# EAGLE board TXS0108 Breakout-Panel (EAGLE 9.6.2), part 1 of 6
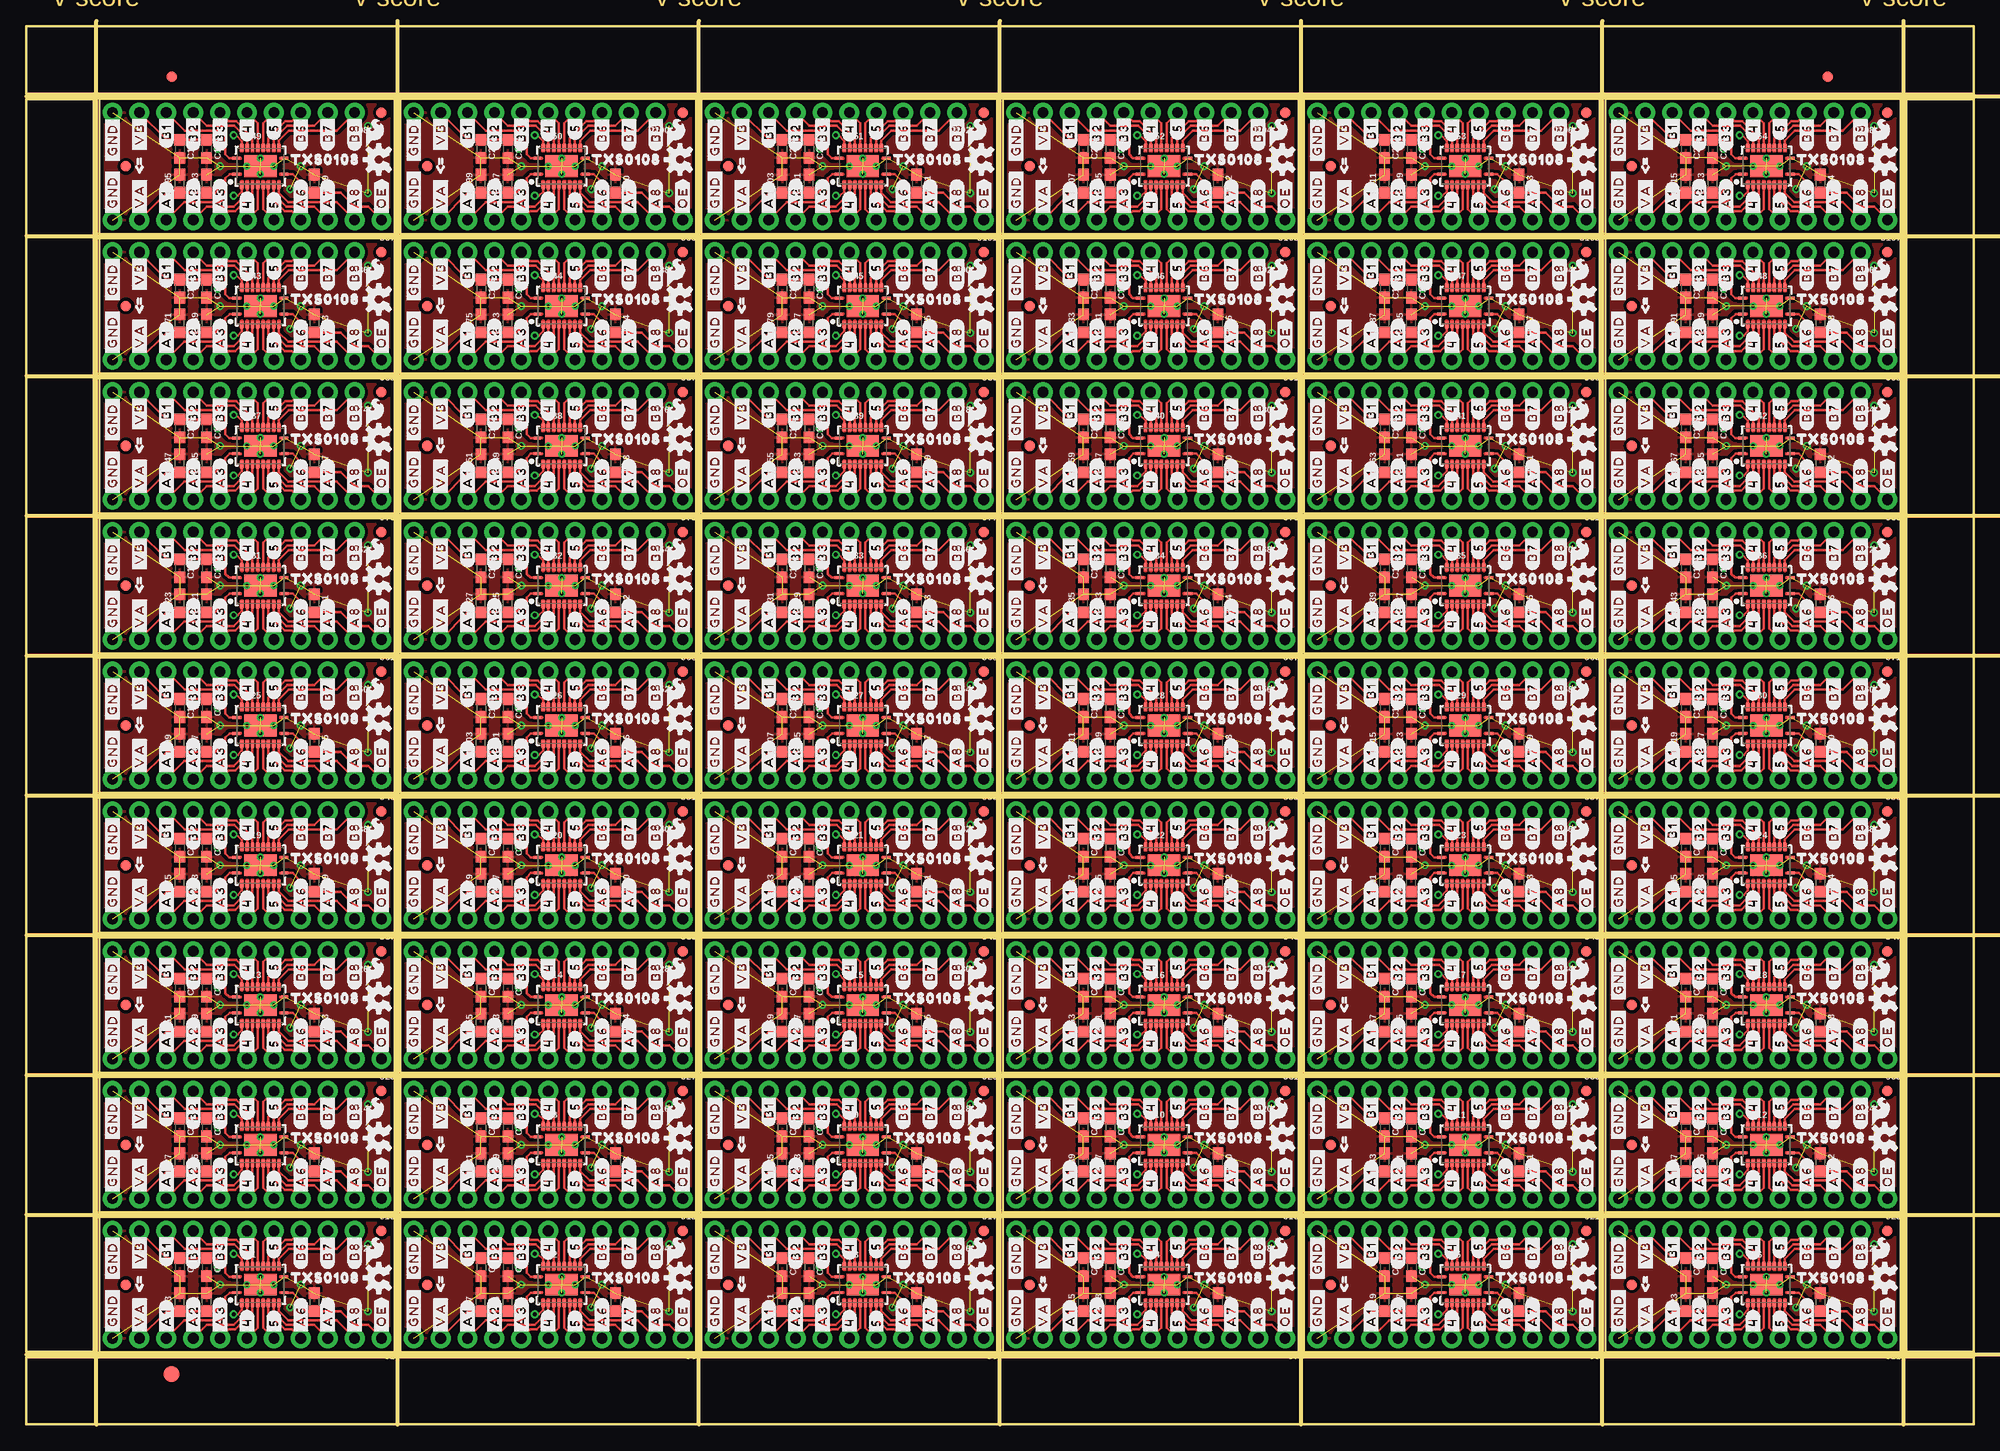
[diagram p0: board, top side]
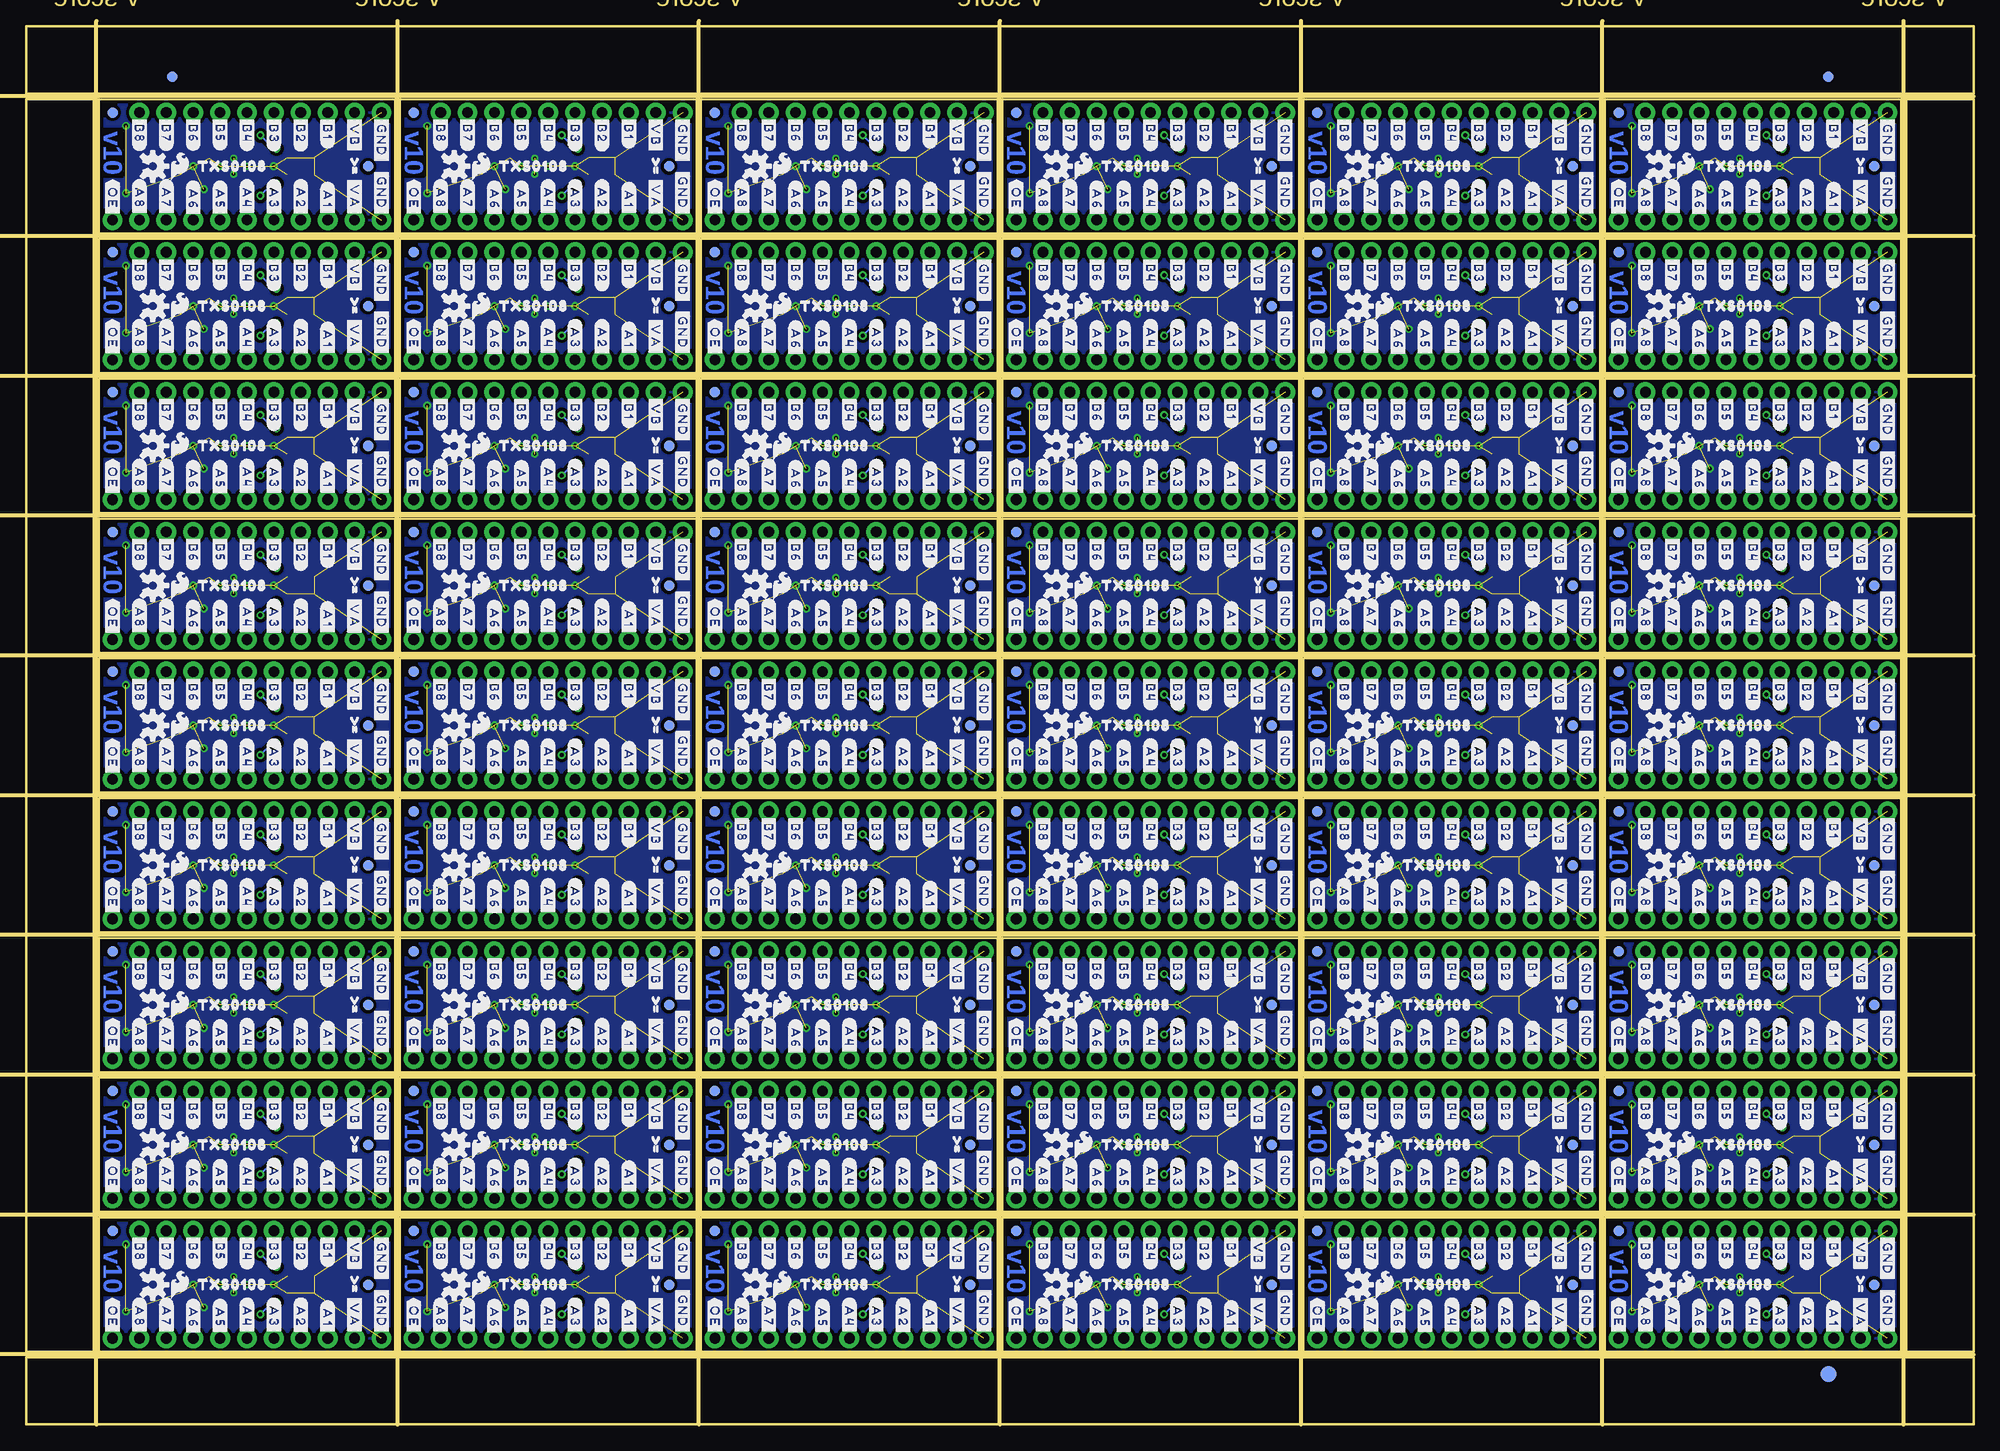
[diagram p1: board, bottom side, seen from below]

Size 183.9 x 132.08 mm. Coordinates in mm from the lower left corner, seen from the top.
Outline: 232 segments
Copper layers (1*16): Top 0.035mm / dielectric 1.5mm / Bottom 0.035mm
Design rules "TXS0108 Breakout": minimum track width 7mil, minimum drill 0.3mm, track to track 7mil, track to pad 7mil, pad to pad 7mil, via to via 7mil, smd to smd 7mil, copper to edge 7mil, drill to drill 7mil, minimum pad ring 7mil, minimum via ring 7mil, stop-mask expansion 3mil, vias tented up to drill 25mil, thermal gap 10mil
tRestrict: area 23.7,13.8 to 23.9,14.1; area 24.2,13.8 to 24.3,13.8; area 20.3,13 to 20.4,13.5; area 23.7,13 to 23.9,13.5; area 52.2,13.8 to 52.3,14.1; area 52.6,13.8 to 52.7,13.8; area 48.8,13 to 48.9,13.5; area 52.2,13 to 52.3,13.5; area 80.6,13.8 to 80.8,14.1; area 81.1,13.8 to 81.2,13.8; area 77.2,13 to 77.3,13.5; area 80.6,13 to 80.8,13.5; 204 more areas
Milling: 17 lines

## Footprints (pad centres in the part's own frame; a part is rotated, then mirrored left to right if it is on the bottom)
0603 = smd 1.1 x 1: 1 -0.85,0; 2 0.85,0
FIDUCIAL-1X2 = smd 1 x 1: 1 0,0
FIDUCIAL-1.5X3 = smd 1.5 x 1.5: 1 0,0
1X11_NO_SILK = drill 1.016 pad 1.88: 1 0,0; 2 2.54,0; 3 5.08,0; 4 7.62,0; 5 10.16,0; 6 12.7,0; 7 15.24,0; 8 17.78,0; 9 20.32,0; 10 22.86,0; 11 25.4,0
1X10_NO_SILK = drill 1.016 pad 1.88: 1 0,0; 2 2.54,0; 3 5.08,0; 4 7.62,0; 5 10.16,0; 6 12.7,0; 7 15.24,0; 8 17.78,0; 9 20.32,0; 10 22.86,0
VFQFN-20 = smd 0.7 x 0.28: 1 -2.3,-0.75; 10 2.3,-0.75; 11 2.3,0.75; 20 -2.3,0.75 | smd 0.28 x 0.7: 2 -1.75,-1.8; 3 -1.25,-1.8; 4 -0.75,-1.8; 5 -0.25,-1.8; 6 0.25,-1.8; 7 0.75,-1.8; 8 1.25,-1.8; 9 1.75,-1.8; 12 1.75,1.8; 13 1.25,1.8; 14 0.75,1.8; 15 0.25,1.8; 16 -0.25,1.8; 17 -0.75,1.8; 18 -1.25,1.8; 19 -1.75,1.8 | smd 3.05 x 2.05: EPAD 0,0

## Placement (x,y rotation side)
C1  0.1uF  [0603]  17.02,11.56 90 top
C2  0.1uF  [0603]  17.02,14.86 270 top
C3  10uF  [0603]  14.48,11.56 90 top
C4  10uF  [0603]  14.48,14.86 270 top
C5  0.1uF  [0603]  45.47,11.56 90 top
C6  0.1uF  [0603]  45.47,14.86 270 top
C7  10uF  [0603]  42.93,11.56 90 top
C8  10uF  [0603]  42.93,14.86 270 top
C9  0.1uF  [0603]  73.91,11.56 90 top
C10  0.1uF  [0603]  73.91,14.86 270 top
C11  10uF  [0603]  71.37,11.56 90 top
C12  10uF  [0603]  71.37,14.86 270 top
C13  0.1uF  [0603]  102.36,11.56 90 top
C14  0.1uF  [0603]  102.36,14.86 270 top
C15  10uF  [0603]  99.82,11.56 90 top
C16  10uF  [0603]  99.82,14.86 270 top
C17  0.1uF  [0603]  130.81,11.56 90 top
C18  0.1uF  [0603]  130.81,14.86 270 top
C19  10uF  [0603]  128.27,11.56 90 top
C20  10uF  [0603]  128.27,14.86 270 top
C21  0.1uF  [0603]  159.26,11.56 90 top
C22  0.1uF  [0603]  159.26,14.86 270 top
C23  10uF  [0603]  156.72,11.56 90 top
C24  10uF  [0603]  156.72,14.86 270 top
C25  0.1uF  [0603]  17.02,24.77 90 top
C26  0.1uF  [0603]  17.02,28.07 270 top
C27  10uF  [0603]  14.48,24.77 90 top
C28  10uF  [0603]  14.48,28.07 270 top
C29  0.1uF  [0603]  45.47,24.77 90 top
C30  0.1uF  [0603]  45.47,28.07 270 top
C31  10uF  [0603]  42.93,24.77 90 top
C32  10uF  [0603]  42.93,28.07 270 top
C33  0.1uF  [0603]  73.91,24.77 90 top
C34  0.1uF  [0603]  73.91,28.07 270 top
C35  10uF  [0603]  71.37,24.77 90 top
C36  10uF  [0603]  71.37,28.07 270 top
C37  0.1uF  [0603]  102.36,24.77 90 top
C38  0.1uF  [0603]  102.36,28.07 270 top
C39  10uF  [0603]  99.82,24.77 90 top
C40  10uF  [0603]  99.82,28.07 270 top
C41  0.1uF  [0603]  130.81,24.77 90 top
C42  0.1uF  [0603]  130.81,28.07 270 top
C43  10uF  [0603]  128.27,24.77 90 top
C44  10uF  [0603]  128.27,28.07 270 top
C45  0.1uF  [0603]  159.26,24.77 90 top
C46  0.1uF  [0603]  159.26,28.07 270 top
C47  10uF  [0603]  156.72,24.77 90 top
C48  10uF  [0603]  156.72,28.07 270 top
C49  0.1uF  [0603]  17.02,37.97 90 top
C50  0.1uF  [0603]  17.02,41.27 270 top
C51  10uF  [0603]  14.48,37.97 90 top
C52  10uF  [0603]  14.48,41.27 270 top
C53  0.1uF  [0603]  45.47,37.97 90 top
C54  0.1uF  [0603]  45.47,41.27 270 top
C55  10uF  [0603]  42.93,37.97 90 top
C56  10uF  [0603]  42.93,41.27 270 top
C57  0.1uF  [0603]  73.91,37.97 90 top
C58  0.1uF  [0603]  73.91,41.27 270 top
C59  10uF  [0603]  71.37,37.97 90 top
C60  10uF  [0603]  71.37,41.27 270 top
C61  0.1uF  [0603]  102.36,37.97 90 top
C62  0.1uF  [0603]  102.36,41.27 270 top
C63  10uF  [0603]  99.82,37.97 90 top
C64  10uF  [0603]  99.82,41.27 270 top
C65  0.1uF  [0603]  130.81,37.97 90 top
C66  0.1uF  [0603]  130.81,41.27 270 top
C67  10uF  [0603]  128.27,37.97 90 top
C68  10uF  [0603]  128.27,41.27 270 top
C69  0.1uF  [0603]  159.26,37.97 90 top
C70  0.1uF  [0603]  159.26,41.27 270 top
C71  10uF  [0603]  156.72,37.97 90 top
C72  10uF  [0603]  156.72,41.27 270 top
C73  0.1uF  [0603]  17.02,51.18 90 top
C74  0.1uF  [0603]  17.02,54.48 270 top
C75  10uF  [0603]  14.48,51.18 90 top
C76  10uF  [0603]  14.48,54.48 270 top
C77  0.1uF  [0603]  45.47,51.18 90 top
C78  0.1uF  [0603]  45.47,54.48 270 top
C79  10uF  [0603]  42.93,51.18 90 top
C80  10uF  [0603]  42.93,54.48 270 top
C81  0.1uF  [0603]  73.91,51.18 90 top
C82  0.1uF  [0603]  73.91,54.48 270 top
C83  10uF  [0603]  71.37,51.18 90 top
C84  10uF  [0603]  71.37,54.48 270 top
C85  0.1uF  [0603]  102.36,51.18 90 top
C86  0.1uF  [0603]  102.36,54.48 270 top
C87  10uF  [0603]  99.82,51.18 90 top
C88  10uF  [0603]  99.82,54.48 270 top
C89  0.1uF  [0603]  130.81,51.18 90 top
C90  0.1uF  [0603]  130.81,54.48 270 top
C91  10uF  [0603]  128.27,51.18 90 top
C92  10uF  [0603]  128.27,54.48 270 top
C93  0.1uF  [0603]  159.26,51.18 90 top
C94  0.1uF  [0603]  159.26,54.48 270 top
C95  10uF  [0603]  156.72,51.18 90 top
C96  10uF  [0603]  156.72,54.48 270 top
C97  0.1uF  [0603]  17.02,64.39 90 top
C98  0.1uF  [0603]  17.02,67.69 270 top
C99  10uF  [0603]  14.48,64.39 90 top
C100  10uF  [0603]  14.48,67.69 270 top
C101  0.1uF  [0603]  45.47,64.39 90 top
C102  0.1uF  [0603]  45.47,67.69 270 top
C103  10uF  [0603]  42.93,64.39 90 top
C104  10uF  [0603]  42.93,67.69 270 top
C105  0.1uF  [0603]  73.91,64.39 90 top
C106  0.1uF  [0603]  73.91,67.69 270 top
C107  10uF  [0603]  71.37,64.39 90 top
C108  10uF  [0603]  71.37,67.69 270 top
C109  0.1uF  [0603]  102.36,64.39 90 top
C110  0.1uF  [0603]  102.36,67.69 270 top
C111  10uF  [0603]  99.82,64.39 90 top
C112  10uF  [0603]  99.82,67.69 270 top
C113  0.1uF  [0603]  130.81,64.39 90 top
C114  0.1uF  [0603]  130.81,67.69 270 top
C115  10uF  [0603]  128.27,64.39 90 top
C116  10uF  [0603]  128.27,67.69 270 top
C117  0.1uF  [0603]  159.26,64.39 90 top
C118  0.1uF  [0603]  159.26,67.69 270 top
C119  10uF  [0603]  156.72,64.39 90 top
C120  10uF  [0603]  156.72,67.69 270 top
C121  0.1uF  [0603]  17.02,77.6 90 top
C122  0.1uF  [0603]  17.02,80.9 270 top
C123  10uF  [0603]  14.48,77.6 90 top
C124  10uF  [0603]  14.48,80.9 270 top
C125  0.1uF  [0603]  45.47,77.6 90 top
C126  0.1uF  [0603]  45.47,80.9 270 top
C127  10uF  [0603]  42.93,77.6 90 top
C128  10uF  [0603]  42.93,80.9 270 top
C129  0.1uF  [0603]  73.91,77.6 90 top
C130  0.1uF  [0603]  73.91,80.9 270 top
C131  10uF  [0603]  71.37,77.6 90 top
C132  10uF  [0603]  71.37,80.9 270 top
C133  0.1uF  [0603]  102.36,77.6 90 top
C134  0.1uF  [0603]  102.36,80.9 270 top
C135  10uF  [0603]  99.82,77.6 90 top
C136  10uF  [0603]  99.82,80.9 270 top
C137  0.1uF  [0603]  130.81,77.6 90 top
C138  0.1uF  [0603]  130.81,80.9 270 top
C139  10uF  [0603]  128.27,77.6 90 top
C140  10uF  [0603]  128.27,80.9 270 top
C141  0.1uF  [0603]  159.26,77.6 90 top
C142  0.1uF  [0603]  159.26,80.9 270 top
C143  10uF  [0603]  156.72,77.6 90 top
C144  10uF  [0603]  156.72,80.9 270 top
C145  0.1uF  [0603]  17.02,90.81 90 top
C146  0.1uF  [0603]  17.02,94.11 270 top
C147  10uF  [0603]  14.48,90.81 90 top
C148  10uF  [0603]  14.48,94.11 270 top
C149  0.1uF  [0603]  45.47,90.81 90 top
C150  0.1uF  [0603]  45.47,94.11 270 top
C151  10uF  [0603]  42.93,90.81 90 top
C152  10uF  [0603]  42.93,94.11 270 top
C153  0.1uF  [0603]  73.91,90.81 90 top
C154  0.1uF  [0603]  73.91,94.11 270 top
C155  10uF  [0603]  71.37,90.81 90 top
C156  10uF  [0603]  71.37,94.11 270 top
C157  0.1uF  [0603]  102.36,90.81 90 top
C158  0.1uF  [0603]  102.36,94.11 270 top
C159  10uF  [0603]  99.82,90.81 90 top
C160  10uF  [0603]  99.82,94.11 270 top
C161  0.1uF  [0603]  130.81,90.81 90 top
C162  0.1uF  [0603]  130.81,94.11 270 top
C163  10uF  [0603]  128.27,90.81 90 top
C164  10uF  [0603]  128.27,94.11 270 top
C165  0.1uF  [0603]  159.26,90.81 90 top
C166  0.1uF  [0603]  159.26,94.11 270 top
C167  10uF  [0603]  156.72,90.81 90 top
C168  10uF  [0603]  156.72,94.11 270 top
C169  0.1uF  [0603]  17.02,104.01 90 top
C170  0.1uF  [0603]  17.02,107.31 270 top
C171  10uF  [0603]  14.48,104.01 90 top
C172  10uF  [0603]  14.48,107.31 270 top
C173  0.1uF  [0603]  45.47,104.01 90 top
C174  0.1uF  [0603]  45.47,107.31 270 top
C175  10uF  [0603]  42.93,104.01 90 top
C176  10uF  [0603]  42.93,107.31 270 top
C177  0.1uF  [0603]  73.91,104.01 90 top
C178  0.1uF  [0603]  73.91,107.31 270 top
C179  10uF  [0603]  71.37,104.01 90 top
C180  10uF  [0603]  71.37,107.31 270 top
C181  0.1uF  [0603]  102.36,104.01 90 top
C182  0.1uF  [0603]  102.36,107.31 270 top
C183  10uF  [0603]  99.82,104.01 90 top
C184  10uF  [0603]  99.82,107.31 270 top
C185  0.1uF  [0603]  130.81,104.01 90 top
C186  0.1uF  [0603]  130.81,107.31 270 top
C187  10uF  [0603]  128.27,104.01 90 top
C188  10uF  [0603]  128.27,107.31 270 top
C189  0.1uF  [0603]  159.26,104.01 90 top
C190  0.1uF  [0603]  159.26,107.31 270 top
C191  10uF  [0603]  156.72,104.01 90 top
C192  10uF  [0603]  156.72,107.31 270 top
C193  0.1uF  [0603]  17.02,117.22 90 top
C194  0.1uF  [0603]  17.02,120.52 270 top
C195  10uF  [0603]  14.48,117.22 90 top
C196  10uF  [0603]  14.48,120.52 270 top
C197  0.1uF  [0603]  45.47,117.22 90 top
C198  0.1uF  [0603]  45.47,120.52 270 top
C199  10uF  [0603]  42.93,117.22 90 top
C200  10uF  [0603]  42.93,120.52 270 top
C201  0.1uF  [0603]  73.91,117.22 90 top
C202  0.1uF  [0603]  73.91,120.52 270 top
C203  10uF  [0603]  71.37,117.22 90 top
C204  10uF  [0603]  71.37,120.52 270 top
C205  0.1uF  [0603]  102.36,117.22 90 top
C206  0.1uF  [0603]  102.36,120.52 270 top
C207  10uF  [0603]  99.82,117.22 90 top
C208  10uF  [0603]  99.82,120.52 270 top
C209  0.1uF  [0603]  130.81,117.22 90 top
C210  0.1uF  [0603]  130.81,120.52 270 top
C211  10uF  [0603]  128.27,117.22 90 top
C212  10uF  [0603]  128.27,120.52 270 top
C213  0.1uF  [0603]  159.26,117.22 90 top
C214  0.1uF  [0603]  159.26,120.52 270 top
C215  10uF  [0603]  156.72,117.22 90 top
C216  10uF  [0603]  156.72,120.52 270 top
E$1  [FIDUCIAL-1X2]  13.72,127.32 0 top
E$2  [FIDUCIAL-1X2]  13.72,127.32 0 bottom
E$3  [FIDUCIAL-1X2]  170.12,127.32 0 top
E$4  [FIDUCIAL-1X2]  170.12,127.32 0 bottom
E$5  [FIDUCIAL-1.5X3]  13.72,4.76 0 top
E$6  [FIDUCIAL-1.5X3]  13.72,4.76 0 bottom
FD1  FIDUCIAL1X2  [FIDUCIAL-1X2]  33.53,18.29 0 top
FD2  FIDUCIAL1X2  [FIDUCIAL-1X2]  33.53,18.29 0 bottom
FD3  FIDUCIAL1X2  [FIDUCIAL-1X2]  9.4,13.21 0 top
FD4  FIDUCIAL1X2  [FIDUCIAL-1X2]  9.4,13.21 0 bottom
FD5  FIDUCIAL1X2  [FIDUCIAL-1X2]  61.98,18.29 0 top
FD6  FIDUCIAL1X2  [FIDUCIAL-1X2]  61.98,18.29 0 bottom
FD7  FIDUCIAL1X2  [FIDUCIAL-1X2]  37.85,13.21 0 top
FD8  FIDUCIAL1X2  [FIDUCIAL-1X2]  37.85,13.21 0 bottom
FD9  FIDUCIAL1X2  [FIDUCIAL-1X2]  90.42,18.29 0 top
FD10  FIDUCIAL1X2  [FIDUCIAL-1X2]  90.42,18.29 0 bottom
FD11  FIDUCIAL1X2  [FIDUCIAL-1X2]  66.29,13.21 0 top
FD12  FIDUCIAL1X2  [FIDUCIAL-1X2]  66.29,13.21 0 bottom
FD13  FIDUCIAL1X2  [FIDUCIAL-1X2]  118.87,18.29 0 top
FD14  FIDUCIAL1X2  [FIDUCIAL-1X2]  118.87,18.29 0 bottom
FD15  FIDUCIAL1X2  [FIDUCIAL-1X2]  94.74,13.21 0 top
FD16  FIDUCIAL1X2  [FIDUCIAL-1X2]  94.74,13.21 0 bottom
FD17  FIDUCIAL1X2  [FIDUCIAL-1X2]  147.32,18.29 0 top
FD18  FIDUCIAL1X2  [FIDUCIAL-1X2]  147.32,18.29 0 bottom
FD19  FIDUCIAL1X2  [FIDUCIAL-1X2]  123.19,13.21 0 top
FD20  FIDUCIAL1X2  [FIDUCIAL-1X2]  123.19,13.21 0 bottom
FD21  FIDUCIAL1X2  [FIDUCIAL-1X2]  175.77,18.29 0 top
FD22  FIDUCIAL1X2  [FIDUCIAL-1X2]  175.77,18.29 0 bottom
FD23  FIDUCIAL1X2  [FIDUCIAL-1X2]  151.64,13.21 0 top
FD24  FIDUCIAL1X2  [FIDUCIAL-1X2]  151.64,13.21 0 bottom
FD25  FIDUCIAL1X2  [FIDUCIAL-1X2]  33.53,31.5 0 top
FD26  FIDUCIAL1X2  [FIDUCIAL-1X2]  33.53,31.5 0 bottom
FD27  FIDUCIAL1X2  [FIDUCIAL-1X2]  9.4,26.42 0 top
FD28  FIDUCIAL1X2  [FIDUCIAL-1X2]  9.4,26.42 0 bottom
FD29  FIDUCIAL1X2  [FIDUCIAL-1X2]  61.98,31.5 0 top
FD30  FIDUCIAL1X2  [FIDUCIAL-1X2]  61.98,31.5 0 bottom
FD31  FIDUCIAL1X2  [FIDUCIAL-1X2]  37.85,26.42 0 top
FD32  FIDUCIAL1X2  [FIDUCIAL-1X2]  37.85,26.42 0 bottom
FD33  FIDUCIAL1X2  [FIDUCIAL-1X2]  90.42,31.5 0 top
FD34  FIDUCIAL1X2  [FIDUCIAL-1X2]  90.42,31.5 0 bottom
FD35  FIDUCIAL1X2  [FIDUCIAL-1X2]  66.29,26.42 0 top
FD36  FIDUCIAL1X2  [FIDUCIAL-1X2]  66.29,26.42 0 bottom
FD37  FIDUCIAL1X2  [FIDUCIAL-1X2]  118.87,31.5 0 top
FD38  FIDUCIAL1X2  [FIDUCIAL-1X2]  118.87,31.5 0 bottom
FD39  FIDUCIAL1X2  [FIDUCIAL-1X2]  94.74,26.42 0 top
FD40  FIDUCIAL1X2  [FIDUCIAL-1X2]  94.74,26.42 0 bottom
FD41  FIDUCIAL1X2  [FIDUCIAL-1X2]  147.32,31.5 0 top
FD42  FIDUCIAL1X2  [FIDUCIAL-1X2]  147.32,31.5 0 bottom
FD43  FIDUCIAL1X2  [FIDUCIAL-1X2]  123.19,26.42 0 top
FD44  FIDUCIAL1X2  [FIDUCIAL-1X2]  123.19,26.42 0 bottom
FD45  FIDUCIAL1X2  [FIDUCIAL-1X2]  175.77,31.5 0 top
FD46  FIDUCIAL1X2  [FIDUCIAL-1X2]  175.77,31.5 0 bottom
FD47  FIDUCIAL1X2  [FIDUCIAL-1X2]  151.64,26.42 0 top
FD48  FIDUCIAL1X2  [FIDUCIAL-1X2]  151.64,26.42 0 bottom
FD49  FIDUCIAL1X2  [FIDUCIAL-1X2]  33.53,44.7 0 top
FD50  FIDUCIAL1X2  [FIDUCIAL-1X2]  33.53,44.7 0 bottom
FD51  FIDUCIAL1X2  [FIDUCIAL-1X2]  9.4,39.62 0 top
FD52  FIDUCIAL1X2  [FIDUCIAL-1X2]  9.4,39.62 0 bottom
FD53  FIDUCIAL1X2  [FIDUCIAL-1X2]  61.98,44.7 0 top
FD54  FIDUCIAL1X2  [FIDUCIAL-1X2]  61.98,44.7 0 bottom
FD55  FIDUCIAL1X2  [FIDUCIAL-1X2]  37.85,39.62 0 top
FD56  FIDUCIAL1X2  [FIDUCIAL-1X2]  37.85,39.62 0 bottom
FD57  FIDUCIAL1X2  [FIDUCIAL-1X2]  90.42,44.7 0 top
FD58  FIDUCIAL1X2  [FIDUCIAL-1X2]  90.42,44.7 0 bottom
FD59  FIDUCIAL1X2  [FIDUCIAL-1X2]  66.29,39.62 0 top
FD60  FIDUCIAL1X2  [FIDUCIAL-1X2]  66.29,39.62 0 bottom
FD61  FIDUCIAL1X2  [FIDUCIAL-1X2]  118.87,44.7 0 top
FD62  FIDUCIAL1X2  [FIDUCIAL-1X2]  118.87,44.7 0 bottom
FD63  FIDUCIAL1X2  [FIDUCIAL-1X2]  94.74,39.62 0 top
FD64  FIDUCIAL1X2  [FIDUCIAL-1X2]  94.74,39.62 0 bottom
FD65  FIDUCIAL1X2  [FIDUCIAL-1X2]  147.32,44.7 0 top
FD66  FIDUCIAL1X2  [FIDUCIAL-1X2]  147.32,44.7 0 bottom
FD67  FIDUCIAL1X2  [FIDUCIAL-1X2]  123.19,39.62 0 top
FD68  FIDUCIAL1X2  [FIDUCIAL-1X2]  123.19,39.62 0 bottom
FD69  FIDUCIAL1X2  [FIDUCIAL-1X2]  175.77,44.7 0 top
FD70  FIDUCIAL1X2  [FIDUCIAL-1X2]  175.77,44.7 0 bottom
FD71  FIDUCIAL1X2  [FIDUCIAL-1X2]  151.64,39.62 0 top
FD72  FIDUCIAL1X2  [FIDUCIAL-1X2]  151.64,39.62 0 bottom
FD73  FIDUCIAL1X2  [FIDUCIAL-1X2]  33.53,57.91 0 top
FD74  FIDUCIAL1X2  [FIDUCIAL-1X2]  33.53,57.91 0 bottom
FD75  FIDUCIAL1X2  [FIDUCIAL-1X2]  9.4,52.83 0 top
FD76  FIDUCIAL1X2  [FIDUCIAL-1X2]  9.4,52.83 0 bottom
FD77  FIDUCIAL1X2  [FIDUCIAL-1X2]  61.98,57.91 0 top
FD78  FIDUCIAL1X2  [FIDUCIAL-1X2]  61.98,57.91 0 bottom
FD79  FIDUCIAL1X2  [FIDUCIAL-1X2]  37.85,52.83 0 top
FD80  FIDUCIAL1X2  [FIDUCIAL-1X2]  37.85,52.83 0 bottom
FD81  FIDUCIAL1X2  [FIDUCIAL-1X2]  90.42,57.91 0 top
FD82  FIDUCIAL1X2  [FIDUCIAL-1X2]  90.42,57.91 0 bottom
FD83  FIDUCIAL1X2  [FIDUCIAL-1X2]  66.29,52.83 0 top
FD84  FIDUCIAL1X2  [FIDUCIAL-1X2]  66.29,52.83 0 bottom
FD85  FIDUCIAL1X2  [FIDUCIAL-1X2]  118.87,57.91 0 top
FD86  FIDUCIAL1X2  [FIDUCIAL-1X2]  118.87,57.91 0 bottom
FD87  FIDUCIAL1X2  [FIDUCIAL-1X2]  94.74,52.83 0 top
FD88  FIDUCIAL1X2  [FIDUCIAL-1X2]  94.74,52.83 0 bottom
FD89  FIDUCIAL1X2  [FIDUCIAL-1X2]  147.32,57.91 0 top
FD90  FIDUCIAL1X2  [FIDUCIAL-1X2]  147.32,57.91 0 bottom
FD91  FIDUCIAL1X2  [FIDUCIAL-1X2]  123.19,52.83 0 top
FD92  FIDUCIAL1X2  [FIDUCIAL-1X2]  123.19,52.83 0 bottom
FD93  FIDUCIAL1X2  [FIDUCIAL-1X2]  175.77,57.91 0 top
FD94  FIDUCIAL1X2  [FIDUCIAL-1X2]  175.77,57.91 0 bottom
FD95  FIDUCIAL1X2  [FIDUCIAL-1X2]  151.64,52.83 0 top
FD96  FIDUCIAL1X2  [FIDUCIAL-1X2]  151.64,52.83 0 bottom
FD97  FIDUCIAL1X2  [FIDUCIAL-1X2]  33.53,71.12 0 top
FD98  FIDUCIAL1X2  [FIDUCIAL-1X2]  33.53,71.12 0 bottom
FD99  FIDUCIAL1X2  [FIDUCIAL-1X2]  9.4,66.04 0 top
FD100  FIDUCIAL1X2  [FIDUCIAL-1X2]  9.4,66.04 0 bottom
FD101  FIDUCIAL1X2  [FIDUCIAL-1X2]  61.98,71.12 0 top
FD102  FIDUCIAL1X2  [FIDUCIAL-1X2]  61.98,71.12 0 bottom
FD103  FIDUCIAL1X2  [FIDUCIAL-1X2]  37.85,66.04 0 top
FD104  FIDUCIAL1X2  [FIDUCIAL-1X2]  37.85,66.04 0 bottom
FD105  FIDUCIAL1X2  [FIDUCIAL-1X2]  90.42,71.12 0 top
FD106  FIDUCIAL1X2  [FIDUCIAL-1X2]  90.42,71.12 0 bottom
FD107  FIDUCIAL1X2  [FIDUCIAL-1X2]  66.29,66.04 0 top
FD108  FIDUCIAL1X2  [FIDUCIAL-1X2]  66.29,66.04 0 bottom
FD109  FIDUCIAL1X2  [FIDUCIAL-1X2]  118.87,71.12 0 top
FD110  FIDUCIAL1X2  [FIDUCIAL-1X2]  118.87,71.12 0 bottom
FD111  FIDUCIAL1X2  [FIDUCIAL-1X2]  94.74,66.04 0 top
FD112  FIDUCIAL1X2  [FIDUCIAL-1X2]  94.74,66.04 0 bottom
FD113  FIDUCIAL1X2  [FIDUCIAL-1X2]  147.32,71.12 0 top
FD114  FIDUCIAL1X2  [FIDUCIAL-1X2]  147.32,71.12 0 bottom
FD115  FIDUCIAL1X2  [FIDUCIAL-1X2]  123.19,66.04 0 top
FD116  FIDUCIAL1X2  [FIDUCIAL-1X2]  123.19,66.04 0 bottom
FD117  FIDUCIAL1X2  [FIDUCIAL-1X2]  175.77,71.12 0 top
FD118  FIDUCIAL1X2  [FIDUCIAL-1X2]  175.77,71.12 0 bottom
FD119  FIDUCIAL1X2  [FIDUCIAL-1X2]  151.64,66.04 0 top
FD120  FIDUCIAL1X2  [FIDUCIAL-1X2]  151.64,66.04 0 bottom
FD121  FIDUCIAL1X2  [FIDUCIAL-1X2]  33.53,84.33 0 top
FD122  FIDUCIAL1X2  [FIDUCIAL-1X2]  33.53,84.33 0 bottom
FD123  FIDUCIAL1X2  [FIDUCIAL-1X2]  9.4,79.25 0 top
FD124  FIDUCIAL1X2  [FIDUCIAL-1X2]  9.4,79.25 0 bottom
FD125  FIDUCIAL1X2  [FIDUCIAL-1X2]  61.98,84.33 0 top
FD126  FIDUCIAL1X2  [FIDUCIAL-1X2]  61.98,84.33 0 bottom
FD127  FIDUCIAL1X2  [FIDUCIAL-1X2]  37.85,79.25 0 top
FD128  FIDUCIAL1X2  [FIDUCIAL-1X2]  37.85,79.25 0 bottom
FD129  FIDUCIAL1X2  [FIDUCIAL-1X2]  90.42,84.33 0 top
FD130  FIDUCIAL1X2  [FIDUCIAL-1X2]  90.42,84.33 0 bottom
FD131  FIDUCIAL1X2  [FIDUCIAL-1X2]  66.29,79.25 0 top
FD132  FIDUCIAL1X2  [FIDUCIAL-1X2]  66.29,79.25 0 bottom
FD133  FIDUCIAL1X2  [FIDUCIAL-1X2]  118.87,84.33 0 top
FD134  FIDUCIAL1X2  [FIDUCIAL-1X2]  118.87,84.33 0 bottom
FD135  FIDUCIAL1X2  [FIDUCIAL-1X2]  94.74,79.25 0 top
FD136  FIDUCIAL1X2  [FIDUCIAL-1X2]  94.74,79.25 0 bottom
FD137  FIDUCIAL1X2  [FIDUCIAL-1X2]  147.32,84.33 0 top
FD138  FIDUCIAL1X2  [FIDUCIAL-1X2]  147.32,84.33 0 bottom
FD139  FIDUCIAL1X2  [FIDUCIAL-1X2]  123.19,79.25 0 top
FD140  FIDUCIAL1X2  [FIDUCIAL-1X2]  123.19,79.25 0 bottom
FD141  FIDUCIAL1X2  [FIDUCIAL-1X2]  175.77,84.33 0 top
FD142  FIDUCIAL1X2  [FIDUCIAL-1X2]  175.77,84.33 0 bottom
FD143  FIDUCIAL1X2  [FIDUCIAL-1X2]  151.64,79.25 0 top
FD144  FIDUCIAL1X2  [FIDUCIAL-1X2]  151.64,79.25 0 bottom
FD145  FIDUCIAL1X2  [FIDUCIAL-1X2]  33.53,97.54 0 top
FD146  FIDUCIAL1X2  [FIDUCIAL-1X2]  33.53,97.54 0 bottom
FD147  FIDUCIAL1X2  [FIDUCIAL-1X2]  9.4,92.46 0 top
FD148  FIDUCIAL1X2  [FIDUCIAL-1X2]  9.4,92.46 0 bottom
FD149  FIDUCIAL1X2  [FIDUCIAL-1X2]  61.98,97.54 0 top
FD150  FIDUCIAL1X2  [FIDUCIAL-1X2]  61.98,97.54 0 bottom
FD151  FIDUCIAL1X2  [FIDUCIAL-1X2]  37.85,92.46 0 top
FD152  FIDUCIAL1X2  [FIDUCIAL-1X2]  37.85,92.46 0 bottom
FD153  FIDUCIAL1X2  [FIDUCIAL-1X2]  90.42,97.54 0 top
FD154  FIDUCIAL1X2  [FIDUCIAL-1X2]  90.42,97.54 0 bottom
FD155  FIDUCIAL1X2  [FIDUCIAL-1X2]  66.29,92.46 0 top
FD156  FIDUCIAL1X2  [FIDUCIAL-1X2]  66.29,92.46 0 bottom
FD157  FIDUCIAL1X2  [FIDUCIAL-1X2]  118.87,97.54 0 top
FD158  FIDUCIAL1X2  [FIDUCIAL-1X2]  118.87,97.54 0 bottom
FD159  FIDUCIAL1X2  [FIDUCIAL-1X2]  94.74,92.46 0 top
FD160  FIDUCIAL1X2  [FIDUCIAL-1X2]  94.74,92.46 0 bottom
FD161  FIDUCIAL1X2  [FIDUCIAL-1X2]  147.32,97.54 0 top
FD162  FIDUCIAL1X2  [FIDUCIAL-1X2]  147.32,97.54 0 bottom
FD163  FIDUCIAL1X2  [FIDUCIAL-1X2]  123.19,92.46 0 top
FD164  FIDUCIAL1X2  [FIDUCIAL-1X2]  123.19,92.46 0 bottom
FD165  FIDUCIAL1X2  [FIDUCIAL-1X2]  175.77,97.54 0 top
FD166  FIDUCIAL1X2  [FIDUCIAL-1X2]  175.77,97.54 0 bottom
FD167  FIDUCIAL1X2  [FIDUCIAL-1X2]  151.64,92.46 0 top
FD168  FIDUCIAL1X2  [FIDUCIAL-1X2]  151.64,92.46 0 bottom
FD169  FIDUCIAL1X2  [FIDUCIAL-1X2]  33.53,110.74 0 top
FD170  FIDUCIAL1X2  [FIDUCIAL-1X2]  33.53,110.74 0 bottom
FD171  FIDUCIAL1X2  [FIDUCIAL-1X2]  9.4,105.66 0 top
FD172  FIDUCIAL1X2  [FIDUCIAL-1X2]  9.4,105.66 0 bottom
FD173  FIDUCIAL1X2  [FIDUCIAL-1X2]  61.98,110.74 0 top
FD174  FIDUCIAL1X2  [FIDUCIAL-1X2]  61.98,110.74 0 bottom
FD175  FIDUCIAL1X2  [FIDUCIAL-1X2]  37.85,105.66 0 top
FD176  FIDUCIAL1X2  [FIDUCIAL-1X2]  37.85,105.66 0 bottom
FD177  FIDUCIAL1X2  [FIDUCIAL-1X2]  90.42,110.74 0 top
FD178  FIDUCIAL1X2  [FIDUCIAL-1X2]  90.42,110.74 0 bottom
FD179  FIDUCIAL1X2  [FIDUCIAL-1X2]  66.29,105.66 0 top
FD180  FIDUCIAL1X2  [FIDUCIAL-1X2]  66.29,105.66 0 bottom
FD181  FIDUCIAL1X2  [FIDUCIAL-1X2]  118.87,110.74 0 top
FD182  FIDUCIAL1X2  [FIDUCIAL-1X2]  118.87,110.74 0 bottom
FD183  FIDUCIAL1X2  [FIDUCIAL-1X2]  94.74,105.66 0 top
FD184  FIDUCIAL1X2  [FIDUCIAL-1X2]  94.74,105.66 0 bottom
FD185  FIDUCIAL1X2  [FIDUCIAL-1X2]  147.32,110.74 0 top
FD186  FIDUCIAL1X2  [FIDUCIAL-1X2]  147.32,110.74 0 bottom
FD187  FIDUCIAL1X2  [FIDUCIAL-1X2]  123.19,105.66 0 top
FD188  FIDUCIAL1X2  [FIDUCIAL-1X2]  123.19,105.66 0 bottom
FD189  FIDUCIAL1X2  [FIDUCIAL-1X2]  175.77,110.74 0 top
FD190  FIDUCIAL1X2  [FIDUCIAL-1X2]  175.77,110.74 0 bottom
FD191  FIDUCIAL1X2  [FIDUCIAL-1X2]  151.64,105.66 0 top
FD192  FIDUCIAL1X2  [FIDUCIAL-1X2]  151.64,105.66 0 bottom
FD193  FIDUCIAL1X2  [FIDUCIAL-1X2]  33.53,123.95 0 top
FD194  FIDUCIAL1X2  [FIDUCIAL-1X2]  33.53,123.95 0 bottom
FD195  FIDUCIAL1X2  [FIDUCIAL-1X2]  9.4,118.87 0 top
FD196  FIDUCIAL1X2  [FIDUCIAL-1X2]  9.4,118.87 0 bottom
FD197  FIDUCIAL1X2  [FIDUCIAL-1X2]  61.98,123.95 0 top
FD198  FIDUCIAL1X2  [FIDUCIAL-1X2]  61.98,123.95 0 bottom
FD199  FIDUCIAL1X2  [FIDUCIAL-1X2]  37.85,118.87 0 top
FD200  FIDUCIAL1X2  [FIDUCIAL-1X2]  37.85,118.87 0 bottom
FD201  FIDUCIAL1X2  [FIDUCIAL-1X2]  90.42,123.95 0 top
FD202  FIDUCIAL1X2  [FIDUCIAL-1X2]  90.42,123.95 0 bottom
FD203  FIDUCIAL1X2  [FIDUCIAL-1X2]  66.29,118.87 0 top
FD204  FIDUCIAL1X2  [FIDUCIAL-1X2]  66.29,118.87 0 bottom
FD205  FIDUCIAL1X2  [FIDUCIAL-1X2]  118.87,123.95 0 top
FD206  FIDUCIAL1X2  [FIDUCIAL-1X2]  118.87,123.95 0 bottom
FD207  FIDUCIAL1X2  [FIDUCIAL-1X2]  94.74,118.87 0 top
FD208  FIDUCIAL1X2  [FIDUCIAL-1X2]  94.74,118.87 0 bottom
FD209  FIDUCIAL1X2  [FIDUCIAL-1X2]  147.32,123.95 0 top
FD210  FIDUCIAL1X2  [FIDUCIAL-1X2]  147.32,123.95 0 bottom
FD211  FIDUCIAL1X2  [FIDUCIAL-1X2]  123.19,118.87 0 top
FD212  FIDUCIAL1X2  [FIDUCIAL-1X2]  123.19,118.87 0 bottom
FD213  FIDUCIAL1X2  [FIDUCIAL-1X2]  175.77,123.95 0 top
FD214  FIDUCIAL1X2  [FIDUCIAL-1X2]  175.77,123.95 0 bottom
FD215  FIDUCIAL1X2  [FIDUCIAL-1X2]  151.64,118.87 0 top
FD216  FIDUCIAL1X2  [FIDUCIAL-1X2]  151.64,118.87 0 bottom
J1  [1X11_NO_SILK]  33.53,8.13 180 top
J2  [1X10_NO_SILK]  30.99,18.29 180 top
J3  [1X11_NO_SILK]  61.98,8.13 180 top
J4  [1X10_NO_SILK]  59.44,18.29 180 top
J5  [1X11_NO_SILK]  90.42,8.13 180 top
J6  [1X10_NO_SILK]  87.88,18.29 180 top
J7  [1X11_NO_SILK]  118.87,8.13 180 top
J8  [1X10_NO_SILK]  116.33,18.29 180 top
J9  [1X11_NO_SILK]  147.32,8.13 180 top
J10  [1X10_NO_SILK]  144.78,18.29 180 top
J11  [1X11_NO_SILK]  175.77,8.13 180 top
J12  [1X10_NO_SILK]  173.23,18.29 180 top
J13  [1X11_NO_SILK]  33.53,21.34 180 top
J14  [1X10_NO_SILK]  30.99,31.5 180 top
J15  [1X11_NO_SILK]  61.98,21.34 180 top
J16  [1X10_NO_SILK]  59.44,31.5 180 top
J17  [1X11_NO_SILK]  90.42,21.34 180 top
J18  [1X10_NO_SILK]  87.88,31.5 180 top
J19  [1X11_NO_SILK]  118.87,21.34 180 top
J20  [1X10_NO_SILK]  116.33,31.5 180 top
J21  [1X11_NO_SILK]  147.32,21.34 180 top
J22  [1X10_NO_SILK]  144.78,31.5 180 top
J23  [1X11_NO_SILK]  175.77,21.34 180 top
J24  [1X10_NO_SILK]  173.23,31.5 180 top
J25  [1X11_NO_SILK]  33.53,34.54 180 top
J26  [1X10_NO_SILK]  30.99,44.7 180 top
J27  [1X11_NO_SILK]  61.98,34.54 180 top
J28  [1X10_NO_SILK]  59.44,44.7 180 top
J29  [1X11_NO_SILK]  90.42,34.54 180 top
J30  [1X10_NO_SILK]  87.88,44.7 180 top
J31  [1X11_NO_SILK]  118.87,34.54 180 top
J32  [1X10_NO_SILK]  116.33,44.7 180 top
J33  [1X11_NO_SILK]  147.32,34.54 180 top
J34  [1X10_NO_SILK]  144.78,44.7 180 top
J35  [1X11_NO_SILK]  175.77,34.54 180 top
J36  [1X10_NO_SILK]  173.23,44.7 180 top
J37  [1X11_NO_SILK]  33.53,47.75 180 top
J38  [1X10_NO_SILK]  30.99,57.91 180 top
J39  [1X11_NO_SILK]  61.98,47.75 180 top
J40  [1X10_NO_SILK]  59.44,57.91 180 top
J41  [1X11_NO_SILK]  90.42,47.75 180 top
J42  [1X10_NO_SILK]  87.88,57.91 180 top
J43  [1X11_NO_SILK]  118.87,47.75 180 top
J44  [1X10_NO_SILK]  116.33,57.91 180 top
J45  [1X11_NO_SILK]  147.32,47.75 180 top
J46  [1X10_NO_SILK]  144.78,57.91 180 top
J47  [1X11_NO_SILK]  175.77,47.75 180 top
J48  [1X10_NO_SILK]  173.23,57.91 180 top
J49  [1X11_NO_SILK]  33.53,60.96 180 top
J50  [1X10_NO_SILK]  30.99,71.12 180 top
J51  [1X11_NO_SILK]  61.98,60.96 180 top
J52  [1X10_NO_SILK]  59.44,71.12 180 top
J53  [1X11_NO_SILK]  90.42,60.96 180 top
J54  [1X10_NO_SILK]  87.88,71.12 180 top
J55  [1X11_NO_SILK]  118.87,60.96 180 top
J56  [1X10_NO_SILK]  116.33,71.12 180 top
J57  [1X11_NO_SILK]  147.32,60.96 180 top
J58  [1X10_NO_SILK]  144.78,71.12 180 top
J59  [1X11_NO_SILK]  175.77,60.96 180 top
J60  [1X10_NO_SILK]  173.23,71.12 180 top
J61  [1X11_NO_SILK]  33.53,74.17 180 top
J62  [1X10_NO_SILK]  30.99,84.33 180 top
J63  [1X11_NO_SILK]  61.98,74.17 180 top
J64  [1X10_NO_SILK]  59.44,84.33 180 top
J65  [1X11_NO_SILK]  90.42,74.17 180 top
J66  [1X10_NO_SILK]  87.88,84.33 180 top
J67  [1X11_NO_SILK]  118.87,74.17 180 top
J68  [1X10_NO_SILK]  116.33,84.33 180 top
J69  [1X11_NO_SILK]  147.32,74.17 180 top
J70  [1X10_NO_SILK]  144.78,84.33 180 top
J71  [1X11_NO_SILK]  175.77,74.17 180 top
J72  [1X10_NO_SILK]  173.23,84.33 180 top
J73  [1X11_NO_SILK]  33.53,87.38 180 top
J74  [1X10_NO_SILK]  30.99,97.54 180 top
J75  [1X11_NO_SILK]  61.98,87.38 180 top
J76  [1X10_NO_SILK]  59.44,97.54 180 top
J77  [1X11_NO_SILK]  90.42,87.38 180 top
J78  [1X10_NO_SILK]  87.88,97.54 180 top
J79  [1X11_NO_SILK]  118.87,87.38 180 top
J80  [1X10_NO_SILK]  116.33,97.54 180 top
J81  [1X11_NO_SILK]  147.32,87.38 180 top
J82  [1X10_NO_SILK]  144.78,97.54 180 top
J83  [1X11_NO_SILK]  175.77,87.38 180 top
J84  [1X10_NO_SILK]  173.23,97.54 180 top
J85  [1X11_NO_SILK]  33.53,100.58 180 top
J86  [1X10_NO_SILK]  30.99,110.74 180 top
J87  [1X11_NO_SILK]  61.98,100.58 180 top
J88  [1X10_NO_SILK]  59.44,110.74 180 top
J89  [1X11_NO_SILK]  90.42,100.58 180 top
J90  [1X10_NO_SILK]  87.88,110.74 180 top
J91  [1X11_NO_SILK]  118.87,100.58 180 top
J92  [1X10_NO_SILK]  116.33,110.74 180 top
J93  [1X11_NO_SILK]  147.32,100.58 180 top
J94  [1X10_NO_SILK]  144.78,110.74 180 top
J95  [1X11_NO_SILK]  175.77,100.58 180 top
J96  [1X10_NO_SILK]  173.23,110.74 180 top
J97  [1X11_NO_SILK]  33.53,113.79 180 top
J98  [1X10_NO_SILK]  30.99,123.95 180 top
J99  [1X11_NO_SILK]  61.98,113.79 180 top
J100  [1X10_NO_SILK]  59.44,123.95 180 top
J101  [1X11_NO_SILK]  90.42,113.79 180 top
J102  [1X10_NO_SILK]  87.88,123.95 180 top
J103  [1X11_NO_SILK]  118.87,113.79 180 top
J104  [1X10_NO_SILK]  116.33,123.95 180 top
J105  [1X11_NO_SILK]  147.32,113.79 180 top
J106  [1X10_NO_SILK]  144.78,123.95 180 top
J107  [1X11_NO_SILK]  175.77,113.79 180 top
J108  [1X10_NO_SILK]  173.23,123.95 180 top
LOGO1  OSHW-LOGOS  [OSHW-LOGO-S]  33.27,13.84 90 top
LOGO2  SFE_LOGO_FLAME.1_INCH  [SFE_LOGO_FLAME_.1]  32.89,16.38 0 top
LOGO3  SFE_LOGO_FLAME.1_INCH  [SFE_LOGO_FLAME_.1]  27.18,13.21 0 bottom
LOGO4  OSHW-LOGOS  [OSHW-LOGO-S]  29.72,13.21 270 bottom
LOGO5  OSHW-LOGOS  [OSHW-LOGO-S]  61.72,13.84 90 top
LOGO6  SFE_LOGO_FLAME.1_INCH  [SFE_LOGO_FLAME_.1]  61.34,16.38 0 top
LOGO7  SFE_LOGO_FLAME.1_INCH  [SFE_LOGO_FLAME_.1]  55.63,13.21 0 bottom
LOGO8  OSHW-LOGOS  [OSHW-LOGO-S]  58.17,13.21 270 bottom
LOGO9  OSHW-LOGOS  [OSHW-LOGO-S]  90.17,13.84 90 top
LOGO10  SFE_LOGO_FLAME.1_INCH  [SFE_LOGO_FLAME_.1]  89.79,16.38 0 top
LOGO11  SFE_LOGO_FLAME.1_INCH  [SFE_LOGO_FLAME_.1]  84.07,13.21 0 bottom
LOGO12  OSHW-LOGOS  [OSHW-LOGO-S]  86.61,13.21 270 bottom
LOGO13  OSHW-LOGOS  [OSHW-LOGO-S]  118.62,13.84 90 top
LOGO14  SFE_LOGO_FLAME.1_INCH  [SFE_LOGO_FLAME_.1]  118.24,16.38 0 top
LOGO15  SFE_LOGO_FLAME.1_INCH  [SFE_LOGO_FLAME_.1]  112.52,13.21 0 bottom
LOGO16  OSHW-LOGOS  [OSHW-LOGO-S]  115.06,13.21 270 bottom
LOGO17  OSHW-LOGOS  [OSHW-LOGO-S]  147.07,13.84 90 top
LOGO18  SFE_LOGO_FLAME.1_INCH  [SFE_LOGO_FLAME_.1]  146.69,16.38 0 top
LOGO19  SFE_LOGO_FLAME.1_INCH  [SFE_LOGO_FLAME_.1]  140.97,13.21 0 bottom
LOGO20  OSHW-LOGOS  [OSHW-LOGO-S]  143.51,13.21 270 bottom
LOGO21  OSHW-LOGOS  [OSHW-LOGO-S]  175.51,13.84 90 top
LOGO22  SFE_LOGO_FLAME.1_INCH  [SFE_LOGO_FLAME_.1]  175.13,16.38 0 top
LOGO23  SFE_LOGO_FLAME.1_INCH  [SFE_LOGO_FLAME_.1]  169.42,13.21 0 bottom
LOGO24  OSHW-LOGOS  [OSHW-LOGO-S]  171.96,13.21 270 bottom
LOGO25  OSHW-LOGOS  [OSHW-LOGO-S]  33.27,27.05 90 top
LOGO26  SFE_LOGO_FLAME.1_INCH  [SFE_LOGO_FLAME_.1]  32.89,29.59 0 top
LOGO27  SFE_LOGO_FLAME.1_INCH  [SFE_LOGO_FLAME_.1]  27.18,26.42 0 bottom
LOGO28  OSHW-LOGOS  [OSHW-LOGO-S]  29.72,26.42 270 bottom
LOGO29  OSHW-LOGOS  [OSHW-LOGO-S]  61.72,27.05 90 top
LOGO30  SFE_LOGO_FLAME.1_INCH  [SFE_LOGO_FLAME_.1]  61.34,29.59 0 top
LOGO31  SFE_LOGO_FLAME.1_INCH  [SFE_LOGO_FLAME_.1]  55.63,26.42 0 bottom
LOGO32  OSHW-LOGOS  [OSHW-LOGO-S]  58.17,26.42 270 bottom
LOGO33  OSHW-LOGOS  [OSHW-LOGO-S]  90.17,27.05 90 top
LOGO34  SFE_LOGO_FLAME.1_INCH  [SFE_LOGO_FLAME_.1]  89.79,29.59 0 top
LOGO35  SFE_LOGO_FLAME.1_INCH  [SFE_LOGO_FLAME_.1]  84.07,26.42 0 bottom
LOGO36  OSHW-LOGOS  [OSHW-LOGO-S]  86.61,26.42 270 bottom
LOGO37  OSHW-LOGOS  [OSHW-LOGO-S]  118.62,27.05 90 top
LOGO38  SFE_LOGO_FLAME.1_INCH  [SFE_LOGO_FLAME_.1]  118.24,29.59 0 top
LOGO39  SFE_LOGO_FLAME.1_INCH  [SFE_LOGO_FLAME_.1]  112.52,26.42 0 bottom
LOGO40  OSHW-LOGOS  [OSHW-LOGO-S]  115.06,26.42 270 bottom
LOGO41  OSHW-LOGOS  [OSHW-LOGO-S]  147.07,27.05 90 top
LOGO42  SFE_LOGO_FLAME.1_INCH  [SFE_LOGO_FLAME_.1]  146.69,29.59 0 top
LOGO43  SFE_LOGO_FLAME.1_INCH  [SFE_LOGO_FLAME_.1]  140.97,26.42 0 bottom
LOGO44  OSHW-LOGOS  [OSHW-LOGO-S]  143.51,26.42 270 bottom
LOGO45  OSHW-LOGOS  [OSHW-LOGO-S]  175.51,27.05 90 top
LOGO46  SFE_LOGO_FLAME.1_INCH  [SFE_LOGO_FLAME_.1]  175.13,29.59 0 top
LOGO47  SFE_LOGO_FLAME.1_INCH  [SFE_LOGO_FLAME_.1]  169.42,26.42 0 bottom
LOGO48  OSHW-LOGOS  [OSHW-LOGO-S]  171.96,26.42 270 bottom
LOGO49  OSHW-LOGOS  [OSHW-LOGO-S]  33.27,40.26 90 top
LOGO50  SFE_LOGO_FLAME.1_INCH  [SFE_LOGO_FLAME_.1]  32.89,42.8 0 top
LOGO51  SFE_LOGO_FLAME.1_INCH  [SFE_LOGO_FLAME_.1]  27.18,39.62 0 bottom
LOGO52  OSHW-LOGOS  [OSHW-LOGO-S]  29.72,39.62 270 bottom
LOGO53  OSHW-LOGOS  [OSHW-LOGO-S]  61.72,40.26 90 top
LOGO54  SFE_LOGO_FLAME.1_INCH  [SFE_LOGO_FLAME_.1]  61.34,42.8 0 top
LOGO55  SFE_LOGO_FLAME.1_INCH  [SFE_LOGO_FLAME_.1]  55.63,39.62 0 bottom
LOGO56  OSHW-LOGOS  [OSHW-LOGO-S]  58.17,39.62 270 bottom
LOGO57  OSHW-LOGOS  [OSHW-LOGO-S]  90.17,40.26 90 top
LOGO58  SFE_LOGO_FLAME.1_INCH  [SFE_LOGO_FLAME_.1]  89.79,42.8 0 top
LOGO59  SFE_LOGO_FLAME.1_INCH  [SFE_LOGO_FLAME_.1]  84.07,39.62 0 bottom
LOGO60  OSHW-LOGOS  [OSHW-LOGO-S]  86.61,39.62 270 bottom
LOGO61  OSHW-LOGOS  [OSHW-LOGO-S]  118.62,40.26 90 top
LOGO62  SFE_LOGO_FLAME.1_INCH  [SFE_LOGO_FLAME_.1]  118.24,42.8 0 top
LOGO63  SFE_LOGO_FLAME.1_INCH  [SFE_LOGO_FLAME_.1]  112.52,39.62 0 bottom
LOGO64  OSHW-LOGOS  [OSHW-LOGO-S]  115.06,39.62 270 bottom
LOGO65  OSHW-LOGOS  [OSHW-LOGO-S]  147.07,40.26 90 top
LOGO66  SFE_LOGO_FLAME.1_INCH  [SFE_LOGO_FLAME_.1]  146.69,42.8 0 top
LOGO67  SFE_LOGO_FLAME.1_INCH  [SFE_LOGO_FLAME_.1]  140.97,39.62 0 bottom
LOGO68  OSHW-LOGOS  [OSHW-LOGO-S]  143.51,39.62 270 bottom
LOGO69  OSHW-LOGOS  [OSHW-LOGO-S]  175.51,40.26 90 top
LOGO70  SFE_LOGO_FLAME.1_INCH  [SFE_LOGO_FLAME_.1]  175.13,42.8 0 top
LOGO71  SFE_LOGO_FLAME.1_INCH  [SFE_LOGO_FLAME_.1]  169.42,39.62 0 bottom
LOGO72  OSHW-LOGOS  [OSHW-LOGO-S]  171.96,39.62 270 bottom
LOGO73  OSHW-LOGOS  [OSHW-LOGO-S]  33.27,53.47 90 top
LOGO74  SFE_LOGO_FLAME.1_INCH  [SFE_LOGO_FLAME_.1]  32.89,56.01 0 top
LOGO75  SFE_LOGO_FLAME.1_INCH  [SFE_LOGO_FLAME_.1]  27.18,52.83 0 bottom
LOGO76  OSHW-LOGOS  [OSHW-LOGO-S]  29.72,52.83 270 bottom
LOGO77  OSHW-LOGOS  [OSHW-LOGO-S]  61.72,53.47 90 top
LOGO78  SFE_LOGO_FLAME.1_INCH  [SFE_LOGO_FLAME_.1]  61.34,56.01 0 top
LOGO79  SFE_LOGO_FLAME.1_INCH  [SFE_LOGO_FLAME_.1]  55.63,52.83 0 bottom
LOGO80  OSHW-LOGOS  [OSHW-LOGO-S]  58.17,52.83 270 bottom
LOGO81  OSHW-LOGOS  [OSHW-LOGO-S]  90.17,53.47 90 top
LOGO82  SFE_LOGO_FLAME.1_INCH  [SFE_LOGO_FLAME_.1]  89.79,56.01 0 top
LOGO83  SFE_LOGO_FLAME.1_INCH  [SFE_LOGO_FLAME_.1]  84.07,52.83 0 bottom
LOGO84  OSHW-LOGOS  [OSHW-LOGO-S]  86.61,52.83 270 bottom
LOGO85  OSHW-LOGOS  [OSHW-LOGO-S]  118.62,53.47 90 top
LOGO86  SFE_LOGO_FLAME.1_INCH  [SFE_LOGO_FLAME_.1]  118.24,56.01 0 top
LOGO87  SFE_LOGO_FLAME.1_INCH  [SFE_LOGO_FLAME_.1]  112.52,52.83 0 bottom
LOGO88  OSHW-LOGOS  [OSHW-LOGO-S]  115.06,52.83 270 bottom
LOGO89  OSHW-LOGOS  [OSHW-LOGO-S]  147.07,53.47 90 top
LOGO90  SFE_LOGO_FLAME.1_INCH  [SFE_LOGO_FLAME_.1]  146.69,56.01 0 top
LOGO91  SFE_LOGO_FLAME.1_INCH  [SFE_LOGO_FLAME_.1]  140.97,52.83 0 bottom
LOGO92  OSHW-LOGOS  [OSHW-LOGO-S]  143.51,52.83 270 bottom
LOGO93  OSHW-LOGOS  [OSHW-LOGO-S]  175.51,53.47 90 top
LOGO94  SFE_LOGO_FLAME.1_INCH  [SFE_LOGO_FLAME_.1]  175.13,56.01 0 top
LOGO95  SFE_LOGO_FLAME.1_INCH  [SFE_LOGO_FLAME_.1]  169.42,52.83 0 bottom
LOGO96  OSHW-LOGOS  [OSHW-LOGO-S]  171.96,52.83 270 bottom
LOGO97  OSHW-LOGOS  [OSHW-LOGO-S]  33.27,66.67 90 top
LOGO98  SFE_LOGO_FLAME.1_INCH  [SFE_LOGO_FLAME_.1]  32.89,69.22 0 top
LOGO99  SFE_LOGO_FLAME.1_INCH  [SFE_LOGO_FLAME_.1]  27.18,66.04 0 bottom
LOGO100  OSHW-LOGOS  [OSHW-LOGO-S]  29.72,66.04 270 bottom
LOGO101  OSHW-LOGOS  [OSHW-LOGO-S]  61.72,66.67 90 top
LOGO102  SFE_LOGO_FLAME.1_INCH  [SFE_LOGO_FLAME_.1]  61.34,69.22 0 top
LOGO103  SFE_LOGO_FLAME.1_INCH  [SFE_LOGO_FLAME_.1]  55.63,66.04 0 bottom
LOGO104  OSHW-LOGOS  [OSHW-LOGO-S]  58.17,66.04 270 bottom
LOGO105  OSHW-LOGOS  [OSHW-LOGO-S]  90.17,66.67 90 top
LOGO106  SFE_LOGO_FLAME.1_INCH  [SFE_LOGO_FLAME_.1]  89.79,69.22 0 top
LOGO107  SFE_LOGO_FLAME.1_INCH  [SFE_LOGO_FLAME_.1]  84.07,66.04 0 bottom
LOGO108  OSHW-LOGOS  [OSHW-LOGO-S]  86.61,66.04 270 bottom
LOGO109  OSHW-LOGOS  [OSHW-LOGO-S]  118.62,66.67 90 top
LOGO110  SFE_LOGO_FLAME.1_INCH  [SFE_LOGO_FLAME_.1]  118.24,69.22 0 top
LOGO111  SFE_LOGO_FLAME.1_INCH  [SFE_LOGO_FLAME_.1]  112.52,66.04 0 bottom
LOGO112  OSHW-LOGOS  [OSHW-LOGO-S]  115.06,66.04 270 bottom
LOGO113  OSHW-LOGOS  [OSHW-LOGO-S]  147.07,66.67 90 top
LOGO114  SFE_LOGO_FLAME.1_INCH  [SFE_LOGO_FLAME_.1]  146.69,69.22 0 top
LOGO115  SFE_LOGO_FLAME.1_INCH  [SFE_LOGO_FLAME_.1]  140.97,66.04 0 bottom
LOGO116  OSHW-LOGOS  [OSHW-LOGO-S]  143.51,66.04 270 bottom
LOGO117  OSHW-LOGOS  [OSHW-LOGO-S]  175.51,66.67 90 top
LOGO118  SFE_LOGO_FLAME.1_INCH  [SFE_LOGO_FLAME_.1]  175.13,69.22 0 top
LOGO119  SFE_LOGO_FLAME.1_INCH  [SFE_LOGO_FLAME_.1]  169.42,66.04 0 bottom
LOGO120  OSHW-LOGOS  [OSHW-LOGO-S]  171.96,66.04 270 bottom
LOGO121  OSHW-LOGOS  [OSHW-LOGO-S]  33.27,79.88 90 top
LOGO122  SFE_LOGO_FLAME.1_INCH  [SFE_LOGO_FLAME_.1]  32.89,82.42 0 top
LOGO123  SFE_LOGO_FLAME.1_INCH  [SFE_LOGO_FLAME_.1]  27.18,79.25 0 bottom
LOGO124  OSHW-LOGOS  [OSHW-LOGO-S]  29.72,79.25 270 bottom
LOGO125  OSHW-LOGOS  [OSHW-LOGO-S]  61.72,79.88 90 top
LOGO126  SFE_LOGO_FLAME.1_INCH  [SFE_LOGO_FLAME_.1]  61.34,82.42 0 top
LOGO127  SFE_LOGO_FLAME.1_INCH  [SFE_LOGO_FLAME_.1]  55.63,79.25 0 bottom
LOGO128  OSHW-LOGOS  [OSHW-LOGO-S]  58.17,79.25 270 bottom
LOGO129  OSHW-LOGOS  [OSHW-LOGO-S]  90.17,79.88 90 top
LOGO130  SFE_LOGO_FLAME.1_INCH  [SFE_LOGO_FLAME_.1]  89.79,82.42 0 top
LOGO131  SFE_LOGO_FLAME.1_INCH  [SFE_LOGO_FLAME_.1]  84.07,79.25 0 bottom
LOGO132  OSHW-LOGOS  [OSHW-LOGO-S]  86.61,79.25 270 bottom
LOGO133  OSHW-LOGOS  [OSHW-LOGO-S]  118.62,79.88 90 top
LOGO134  SFE_LOGO_FLAME.1_INCH  [SFE_LOGO_FLAME_.1]  118.24,82.42 0 top
LOGO135  SFE_LOGO_FLAME.1_INCH  [SFE_LOGO_FLAME_.1]  112.52,79.25 0 bottom
LOGO136  OSHW-LOGOS  [OSHW-LOGO-S]  115.06,79.25 270 bottom
LOGO137  OSHW-LOGOS  [OSHW-LOGO-S]  147.07,79.88 90 top
LOGO138  SFE_LOGO_FLAME.1_INCH  [SFE_LOGO_FLAME_.1]  146.69,82.42 0 top
LOGO139  SFE_LOGO_FLAME.1_INCH  [SFE_LOGO_FLAME_.1]  140.97,79.25 0 bottom
LOGO140  OSHW-LOGOS  [OSHW-LOGO-S]  143.51,79.25 270 bottom
LOGO141  OSHW-LOGOS  [OSHW-LOGO-S]  175.51,79.88 90 top
LOGO142  SFE_LOGO_FLAME.1_INCH  [SFE_LOGO_FLAME_.1]  175.13,82.42 0 top
LOGO143  SFE_LOGO_FLAME.1_INCH  [SFE_LOGO_FLAME_.1]  169.42,79.25 0 bottom
LOGO144  OSHW-LOGOS  [OSHW-LOGO-S]  171.96,79.25 270 bottom
LOGO145  OSHW-LOGOS  [OSHW-LOGO-S]  33.27,93.09 90 top
LOGO146  SFE_LOGO_FLAME.1_INCH  [SFE_LOGO_FLAME_.1]  32.89,95.63 0 top
LOGO147  SFE_LOGO_FLAME.1_INCH  [SFE_LOGO_FLAME_.1]  27.18,92.46 0 bottom
LOGO148  OSHW-LOGOS  [OSHW-LOGO-S]  29.72,92.46 270 bottom
LOGO149  OSHW-LOGOS  [OSHW-LOGO-S]  61.72,93.09 90 top
LOGO150  SFE_LOGO_FLAME.1_INCH  [SFE_LOGO_FLAME_.1]  61.34,95.63 0 top
LOGO151  SFE_LOGO_FLAME.1_INCH  [SFE_LOGO_FLAME_.1]  55.63,92.46 0 bottom
LOGO152  OSHW-LOGOS  [OSHW-LOGO-S]  58.17,92.46 270 bottom
LOGO153  OSHW-LOGOS  [OSHW-LOGO-S]  90.17,93.09 90 top
LOGO154  SFE_LOGO_FLAME.1_INCH  [SFE_LOGO_FLAME_.1]  89.79,95.63 0 top
LOGO155  SFE_LOGO_FLAME.1_INCH  [SFE_LOGO_FLAME_.1]  84.07,92.46 0 bottom
LOGO156  OSHW-LOGOS  [OSHW-LOGO-S]  86.61,92.46 270 bottom
LOGO157  OSHW-LOGOS  [OSHW-LOGO-S]  118.62,93.09 90 top
LOGO158  SFE_LOGO_FLAME.1_INCH  [SFE_LOGO_FLAME_.1]  118.24,95.63 0 top
LOGO159  SFE_LOGO_FLAME.1_INCH  [SFE_LOGO_FLAME_.1]  112.52,92.46 0 bottom
LOGO160  OSHW-LOGOS  [OSHW-LOGO-S]  115.06,92.46 270 bottom
LOGO161  OSHW-LOGOS  [OSHW-LOGO-S]  147.07,93.09 90 top
LOGO162  SFE_LOGO_FLAME.1_INCH  [SFE_LOGO_FLAME_.1]  146.69,95.63 0 top
LOGO163  SFE_LOGO_FLAME.1_INCH  [SFE_LOGO_FLAME_.1]  140.97,92.46 0 bottom
LOGO164  OSHW-LOGOS  [OSHW-LOGO-S]  143.51,92.46 270 bottom
LOGO165  OSHW-LOGOS  [OSHW-LOGO-S]  175.51,93.09 90 top
LOGO166  SFE_LOGO_FLAME.1_INCH  [SFE_LOGO_FLAME_.1]  175.13,95.63 0 top
LOGO167  SFE_LOGO_FLAME.1_INCH  [SFE_LOGO_FLAME_.1]  169.42,92.46 0 bottom
LOGO168  OSHW-LOGOS  [OSHW-LOGO-S]  171.96,92.46 270 bottom
LOGO169  OSHW-LOGOS  [OSHW-LOGO-S]  33.27,106.3 90 top
LOGO170  SFE_LOGO_FLAME.1_INCH  [SFE_LOGO_FLAME_.1]  32.89,108.84 0 top
LOGO171  SFE_LOGO_FLAME.1_INCH  [SFE_LOGO_FLAME_.1]  27.18,105.66 0 bottom
LOGO172  OSHW-LOGOS  [OSHW-LOGO-S]  29.72,105.66 270 bottom
LOGO173  OSHW-LOGOS  [OSHW-LOGO-S]  61.72,106.3 90 top
LOGO174  SFE_LOGO_FLAME.1_INCH  [SFE_LOGO_FLAME_.1]  61.34,108.84 0 top
LOGO175  SFE_LOGO_FLAME.1_INCH  [SFE_LOGO_FLAME_.1]  55.63,105.66 0 bottom
LOGO176  OSHW-LOGOS  [OSHW-LOGO-S]  58.17,105.66 270 bottom
LOGO177  OSHW-LOGOS  [OSHW-LOGO-S]  90.17,106.3 90 top
LOGO178  SFE_LOGO_FLAME.1_INCH  [SFE_LOGO_FLAME_.1]  89.79,108.84 0 top
LOGO179  SFE_LOGO_FLAME.1_INCH  [SFE_LOGO_FLAME_.1]  84.07,105.66 0 bottom
LOGO180  OSHW-LOGOS  [OSHW-LOGO-S]  86.61,105.66 270 bottom
LOGO181  OSHW-LOGOS  [OSHW-LOGO-S]  118.62,106.3 90 top
LOGO182  SFE_LOGO_FLAME.1_INCH  [SFE_LOGO_FLAME_.1]  118.24,108.84 0 top
LOGO183  SFE_LOGO_FLAME.1_INCH  [SFE_LOGO_FLAME_.1]  112.52,105.66 0 bottom
LOGO184  OSHW-LOGOS  [OSHW-LOGO-S]  115.06,105.66 270 bottom
LOGO185  OSHW-LOGOS  [OSHW-LOGO-S]  147.07,106.3 90 top
LOGO186  SFE_LOGO_FLAME.1_INCH  [SFE_LOGO_FLAME_.1]  146.69,108.84 0 top
LOGO187  SFE_LOGO_FLAME.1_INCH  [SFE_LOGO_FLAME_.1]  140.97,105.66 0 bottom
LOGO188  OSHW-LOGOS  [OSHW-LOGO-S]  143.51,105.66 270 bottom
LOGO189  OSHW-LOGOS  [OSHW-LOGO-S]  175.51,106.3 90 top
LOGO190  SFE_LOGO_FLAME.1_INCH  [SFE_LOGO_FLAME_.1]  175.13,108.84 0 top
LOGO191  SFE_LOGO_FLAME.1_INCH  [SFE_LOGO_FLAME_.1]  169.42,105.66 0 bottom
LOGO192  OSHW-LOGOS  [OSHW-LOGO-S]  171.96,105.66 270 bottom
LOGO193  OSHW-LOGOS  [OSHW-LOGO-S]  33.27,119.51 90 top
LOGO194  SFE_LOGO_FLAME.1_INCH  [SFE_LOGO_FLAME_.1]  32.89,122.05 0 top
LOGO195  SFE_LOGO_FLAME.1_INCH  [SFE_LOGO_FLAME_.1]  27.18,118.87 0 bottom
LOGO196  OSHW-LOGOS  [OSHW-LOGO-S]  29.72,118.87 270 bottom
LOGO197  OSHW-LOGOS  [OSHW-LOGO-S]  61.72,119.51 90 top
LOGO198  SFE_LOGO_FLAME.1_INCH  [SFE_LOGO_FLAME_.1]  61.34,122.05 0 top
LOGO199  SFE_LOGO_FLAME.1_INCH  [SFE_LOGO_FLAME_.1]  55.63,118.87 0 bottom
LOGO200  OSHW-LOGOS  [OSHW-LOGO-S]  58.17,118.87 270 bottom
LOGO201  OSHW-LOGOS  [OSHW-LOGO-S]  90.17,119.51 90 top
LOGO202  SFE_LOGO_FLAME.1_INCH  [SFE_LOGO_FLAME_.1]  89.79,122.05 0 top
LOGO203  SFE_LOGO_FLAME.1_INCH  [SFE_LOGO_FLAME_.1]  84.07,118.87 0 bottom
LOGO204  OSHW-LOGOS  [OSHW-LOGO-S]  86.61,118.87 270 bottom
LOGO205  OSHW-LOGOS  [OSHW-LOGO-S]  118.62,119.51 90 top
LOGO206  SFE_LOGO_FLAME.1_INCH  [SFE_LOGO_FLAME_.1]  118.24,122.05 0 top
LOGO207  SFE_LOGO_FLAME.1_INCH  [SFE_LOGO_FLAME_.1]  112.52,118.87 0 bottom
LOGO208  OSHW-LOGOS  [OSHW-LOGO-S]  115.06,118.87 270 bottom
LOGO209  OSHW-LOGOS  [OSHW-LOGO-S]  147.07,119.51 90 top
LOGO210  SFE_LOGO_FLAME.1_INCH  [SFE_LOGO_FLAME_.1]  146.69,122.05 0 top
LOGO211  SFE_LOGO_FLAME.1_INCH  [SFE_LOGO_FLAME_.1]  140.97,118.87 0 bottom
LOGO212  OSHW-LOGOS  [OSHW-LOGO-S]  143.51,118.87 270 bottom
LOGO213  OSHW-LOGOS  [OSHW-LOGO-S]  175.51,119.51 90 top
LOGO214  SFE_LOGO_FLAME.1_INCH  [SFE_LOGO_FLAME_.1]  175.13,122.05 0 top
LOGO215  SFE_LOGO_FLAME.1_INCH  [SFE_LOGO_FLAME_.1]  169.42,118.87 0 bottom
LOGO216  OSHW-LOGOS  [OSHW-LOGO-S]  171.96,118.87 270 bottom
R1  100k  [0603]  27.18,11.56 270 top
R2  100k  [0603]  55.63,11.56 270 top
R3  100k  [0603]  84.07,11.56 270 top
R4  100k  [0603]  112.52,11.56 270 top
R5  100k  [0603]  140.97,11.56 270 top
R6  100k  [0603]  169.42,11.56 270 top
R7  100k  [0603]  27.18,24.77 270 top
R8  100k  [0603]  55.63,24.77 270 top
R9  100k  [0603]  84.07,24.77 270 top
R10  100k  [0603]  112.52,24.77 270 top
R11  100k  [0603]  140.97,24.77 270 top
R12  100k  [0603]  169.42,24.77 270 top
R13  100k  [0603]  27.18,37.97 270 top
R14  100k  [0603]  55.63,37.97 270 top
R15  100k  [0603]  84.07,37.97 270 top
R16  100k  [0603]  112.52,37.97 270 top
R17  100k  [0603]  140.97,37.97 270 top
R18  100k  [0603]  169.42,37.97 270 top
R19  100k  [0603]  27.18,51.18 270 top
R20  100k  [0603]  55.63,51.18 270 top
R21  100k  [0603]  84.07,51.18 270 top
R22  100k  [0603]  112.52,51.18 270 top
R23  100k  [0603]  140.97,51.18 270 top
R24  100k  [0603]  169.42,51.18 270 top
R25  100k  [0603]  27.18,64.39 270 top
R26  100k  [0603]  55.63,64.39 270 top
R27  100k  [0603]  84.07,64.39 270 top
R28  100k  [0603]  112.52,64.39 270 top
R29  100k  [0603]  140.97,64.39 270 top
R30  100k  [0603]  169.42,64.39 270 top
R31  100k  [0603]  27.18,77.6 270 top
R32  100k  [0603]  55.63,77.6 270 top
R33  100k  [0603]  84.07,77.6 270 top
R34  100k  [0603]  112.52,77.6 270 top
R35  100k  [0603]  140.97,77.6 270 top
R36  100k  [0603]  169.42,77.6 270 top
R37  100k  [0603]  27.18,90.81 270 top
R38  100k  [0603]  55.63,90.81 270 top
R39  100k  [0603]  84.07,90.81 270 top
R40  100k  [0603]  112.52,90.81 270 top
R41  100k  [0603]  140.97,90.81 270 top
R42  100k  [0603]  169.42,90.81 270 top
R43  100k  [0603]  27.18,104.01 270 top
R44  100k  [0603]  55.63,104.01 270 top
R45  100k  [0603]  84.07,104.01 270 top
R46  100k  [0603]  112.52,104.01 270 top
R47  100k  [0603]  140.97,104.01 270 top
R48  100k  [0603]  169.42,104.01 270 top
R49  100k  [0603]  27.18,117.22 270 top
R50  100k  [0603]  55.63,117.22 270 top
R51  100k  [0603]  84.07,117.22 270 top
R52  100k  [0603]  112.52,117.22 270 top
R53  100k  [0603]  140.97,117.22 270 top
R54  100k  [0603]  169.42,117.22 270 top
U1  TXS0108  [VFQFN-20]  22.1,13.21 0 top
U2  TXS0108  [VFQFN-20]  50.55,13.21 0 top
U3  TXS0108  [VFQFN-20]  78.99,13.21 0 top
U4  TXS0108  [VFQFN-20]  107.44,13.21 0 top
U5  TXS0108  [VFQFN-20]  135.89,13.21 0 top
U6  TXS0108  [VFQFN-20]  164.34,13.21 0 top
U7  TXS0108  [VFQFN-20]  22.1,26.42 0 top
U8  TXS0108  [VFQFN-20]  50.55,26.42 0 top
U9  TXS0108  [VFQFN-20]  78.99,26.42 0 top
U10  TXS0108  [VFQFN-20]  107.44,26.42 0 top
U11  TXS0108  [VFQFN-20]  135.89,26.42 0 top
U12  TXS0108  [VFQFN-20]  164.34,26.42 0 top
U13  TXS0108  [VFQFN-20]  22.1,39.62 0 top
U14  TXS0108  [VFQFN-20]  50.55,39.62 0 top
U15  TXS0108  [VFQFN-20]  78.99,39.62 0 top
U16  TXS0108  [VFQFN-20]  107.44,39.62 0 top
U17  TXS0108  [VFQFN-20]  135.89,39.62 0 top
U18  TXS0108  [VFQFN-20]  164.34,39.62 0 top
U19  TXS0108  [VFQFN-20]  22.1,52.83 0 top
U20  TXS0108  [VFQFN-20]  50.55,52.83 0 top
U21  TXS0108  [VFQFN-20]  78.99,52.83 0 top
U22  TXS0108  [VFQFN-20]  107.44,52.83 0 top
U23  TXS0108  [VFQFN-20]  135.89,52.83 0 top
U24  TXS0108  [VFQFN-20]  164.34,52.83 0 top
U25  TXS0108  [VFQFN-20]  22.1,66.04 0 top
U26  TXS0108  [VFQFN-20]  50.55,66.04 0 top
U27  TXS0108  [VFQFN-20]  78.99,66.04 0 top
U28  TXS0108  [VFQFN-20]  107.44,66.04 0 top
U29  TXS0108  [VFQFN-20]  135.89,66.04 0 top
U30  TXS0108  [VFQFN-20]  164.34,66.04 0 top
U31  TXS0108  [VFQFN-20]  22.1,79.25 0 top
U32  TXS0108  [VFQFN-20]  50.55,79.25 0 top
U33  TXS0108  [VFQFN-20]  78.99,79.25 0 top
U34  TXS0108  [VFQFN-20]  107.44,79.25 0 top
U35  TXS0108  [VFQFN-20]  135.89,79.25 0 top
U36  TXS0108  [VFQFN-20]  164.34,79.25 0 top
U37  TXS0108  [VFQFN-20]  22.1,92.46 0 top
U38  TXS0108  [VFQFN-20]  50.55,92.46 0 top
U39  TXS0108  [VFQFN-20]  78.99,92.46 0 top
U40  TXS0108  [VFQFN-20]  107.44,92.46 0 top
U41  TXS0108  [VFQFN-20]  135.89,92.46 0 top
U42  TXS0108  [VFQFN-20]  164.34,92.46 0 top
U43  TXS0108  [VFQFN-20]  22.1,105.66 0 top
U44  TXS0108  [VFQFN-20]  50.55,105.66 0 top
U45  TXS0108  [VFQFN-20]  78.99,105.66 0 top
U46  TXS0108  [VFQFN-20]  107.44,105.66 0 top
U47  TXS0108  [VFQFN-20]  135.89,105.66 0 top
U48  TXS0108  [VFQFN-20]  164.34,105.66 0 top
U49  TXS0108  [VFQFN-20]  22.1,118.87 0 top
U50  TXS0108  [VFQFN-20]  50.55,118.87 0 top
U51  TXS0108  [VFQFN-20]  78.99,118.87 0 top
U52  TXS0108  [VFQFN-20]  107.44,118.87 0 top
U53  TXS0108  [VFQFN-20]  135.89,118.87 0 top
U54  TXS0108  [VFQFN-20]  164.34,118.87 0 top
U$1  [#GND#0]  8.13,13.46 90 top
U$2  [#GND#0]  8.13,8.51 90 top
U$3  [#VA#0]  10.67,8.51 90 top
U$4  [#VA#0]  10.67,12.19 270 bottom
U$5  [#A1#0]  13.21,8.51 90 top
U$6  [#A2#0]  15.75,8.51 90 top
U$7  [#A3#0]  18.29,8.51 90 top
U$8  [#4#0]  20.83,8.51 90 top
U$9  [#5#0]  23.37,8.51 90 top
U$10  [#A6#0]  25.91,8.51 90 top
U$11  [#A7#0]  28.45,8.51 90 top
U$12  [#A8#0]  30.99,8.51 90 top
U$13  [#B8#0]  30.99,14.73 90 top
U$14  [#B7#0]  28.45,14.73 90 top
U$15  [#B6#0]  25.91,14.73 90 top
U$16  [#4#6]  20.83,15.62 90 top
U$17  [#5#6]  23.37,15.75 90 top
U$18  [#B3#0]  18.29,14.73 90 top
U$19  [#B2#0]  15.75,14.73 90 top
U$20  [#B1#0]  13.21,14.99 90 top
U$21  [#OE#0]  33.53,8.51 90 top
U$22  [#VB#0]  10.67,14.48 90 top
U$23  [#VB#0]  10.67,17.91 270 bottom
U$24  [#A1#2]  13.21,11.68 270 bottom
U$25  [#A2#2]  15.75,11.94 270 bottom
U$26  [#A3#3]  18.29,11.94 270 bottom
U$27  [#A4#4]  20.83,11.94 270 bottom
U$28  [#A5#5]  23.37,11.81 270 bottom
U$29  [#A6#6]  25.91,11.81 270 bottom
U$30  [#A7#8]  28.45,11.94 270 bottom
U$31  [#A8#9]  30.99,11.94 270 bottom
U$32  [#GND#0]  8.13,17.91 270 bottom
U$33  [#0]  10.67,13.74 90 top
U$34  [#GND#0]  8.13,12.95 270 bottom
U$35  [#B8#9]  30.99,17.91 270 bottom
U$36  [#B7#9]  28.45,17.91 270 bottom
U$37  [#B6#9]  25.91,17.91 270 bottom
U$38  [#B5#9]  23.37,17.91 270 bottom
U$39  [#B4#9]  20.83,17.91 270 bottom
U$40  [#B3#9]  18.29,17.91 270 bottom
U$41  [#B2#9]  15.75,17.91 270 bottom
U$42  [#B1#9]  13.21,17.91 270 bottom
U$43  [TXS01080]  26.16,13.21 0 bottom
U$44  [TXS01080]  24.26,13.84 0 top
U$45  [#OE#1]  33.53,11.94 270 bottom
U$46  [V0]  10.74,13.03 0 top
U$47  [#0]  10.67,12.9 90 bottom
U$48  [V0]  10.59,13.74 0 bottom
U$49  [#GND#0]  36.58,13.46 90 top
U$50  [#GND#0]  36.58,8.51 90 top
U$51  [#OE#0]  61.98,8.51 90 top
U$52  [#VA#0]  39.12,8.51 90 top
U$53  [#VA#0]  39.12,12.19 270 bottom
U$54  [#VB#0]  39.12,14.48 90 top
U$55  [#VB#0]  39.12,17.91 270 bottom
U$56  [#GND#0]  36.58,17.91 270 bottom
U$57  [#GND#0]  36.58,12.95 270 bottom
U$58  [TXS01080]  54.61,13.21 0 bottom
U$59  [TXS01080]  52.7,13.84 0 top
U$60  [#A1#0]  41.66,8.51 90 top
U$61  [#A2#0]  44.2,8.51 90 top
U$62  [#A3#0]  46.74,8.51 90 top
U$63  [#A6#0]  54.36,8.51 90 top
U$64  [#A7#0]  56.9,8.51 90 top
U$65  [#A8#0]  59.44,8.51 90 top
U$66  [#B8#0]  59.44,14.73 90 top
U$67  [#B7#0]  56.9,14.73 90 top
U$68  [#B6#0]  54.36,14.73 90 top
U$69  [#B3#0]  46.74,14.73 90 top
U$70  [#B2#0]  44.2,14.73 90 top
U$71  [#B1#0]  41.66,14.99 90 top
U$72  [#A1#2]  41.66,11.68 270 bottom
U$73  [#A2#2]  44.2,11.94 270 bottom
U$74  [#A3#3]  46.74,11.94 270 bottom
U$75  [#A4#4]  49.28,11.94 270 bottom
U$76  [#A5#5]  51.82,11.81 270 bottom
U$77  [#A6#6]  54.36,11.81 270 bottom
U$78  [#A7#8]  56.9,11.94 270 bottom
U$79  [#A8#9]  59.44,11.94 270 bottom
U$80  [#B8#9]  59.44,17.91 270 bottom
U$81  [#B7#9]  56.9,17.91 270 bottom
U$82  [#B6#9]  54.36,17.91 270 bottom
U$83  [#B5#9]  51.82,17.91 270 bottom
U$84  [#B4#9]  49.28,17.91 270 bottom
U$85  [#B3#9]  46.74,17.91 270 bottom
U$86  [#B2#9]  44.2,17.91 270 bottom
U$87  [#B1#9]  41.66,17.91 270 bottom
U$88  [#OE#1]  61.98,11.94 270 bottom
U$89  [#0]  39.12,13.74 90 top
U$90  [V0]  39.19,13.03 0 top
U$91  [#0]  39.12,12.9 90 bottom
U$92  [V0]  39.04,13.74 0 bottom
U$93  [#4#0]  49.28,8.51 90 top
U$94  [#5#0]  51.82,8.51 90 top
U$95  [#4#6]  49.28,15.62 90 top
U$96  [#5#6]  51.82,15.75 90 top
U$97  [#GND#0]  65.02,13.46 90 top
U$98  [#GND#0]  65.02,8.51 90 top
U$99  [#OE#0]  90.42,8.51 90 top
U$100  [#VA#0]  67.56,8.51 90 top
U$101  [#VA#0]  67.56,12.19 270 bottom
U$102  [#VB#0]  67.56,14.48 90 top
U$103  [#VB#0]  67.56,17.91 270 bottom
U$104  [#GND#0]  65.02,17.91 270 bottom
U$105  [#GND#0]  65.02,12.95 270 bottom
U$106  [TXS01080]  83.06,13.21 0 bottom
U$107  [TXS01080]  81.15,13.84 0 top
U$108  [#A1#0]  70.1,8.51 90 top
U$109  [#A2#0]  72.64,8.51 90 top
U$110  [#A3#0]  75.18,8.51 90 top
U$111  [#A6#0]  82.8,8.51 90 top